# Altium PCB PnP.PcbDoc (part 1 of 5)
Units mm, origin at the board's own origin, x right, y up, seen from the top; angles counter-clockwise.
Board outline 95 x 65 mm, 6 copper layers (Top Layer, L2 - GND, L3 - PWR, L4 - Sig, L5 - GND, Bottom Layer), stack 1.538 mm thick; 358 components, 260 nets, 1269 pads, 686 vias.
Unrouted connection lines stored in the file: 161.
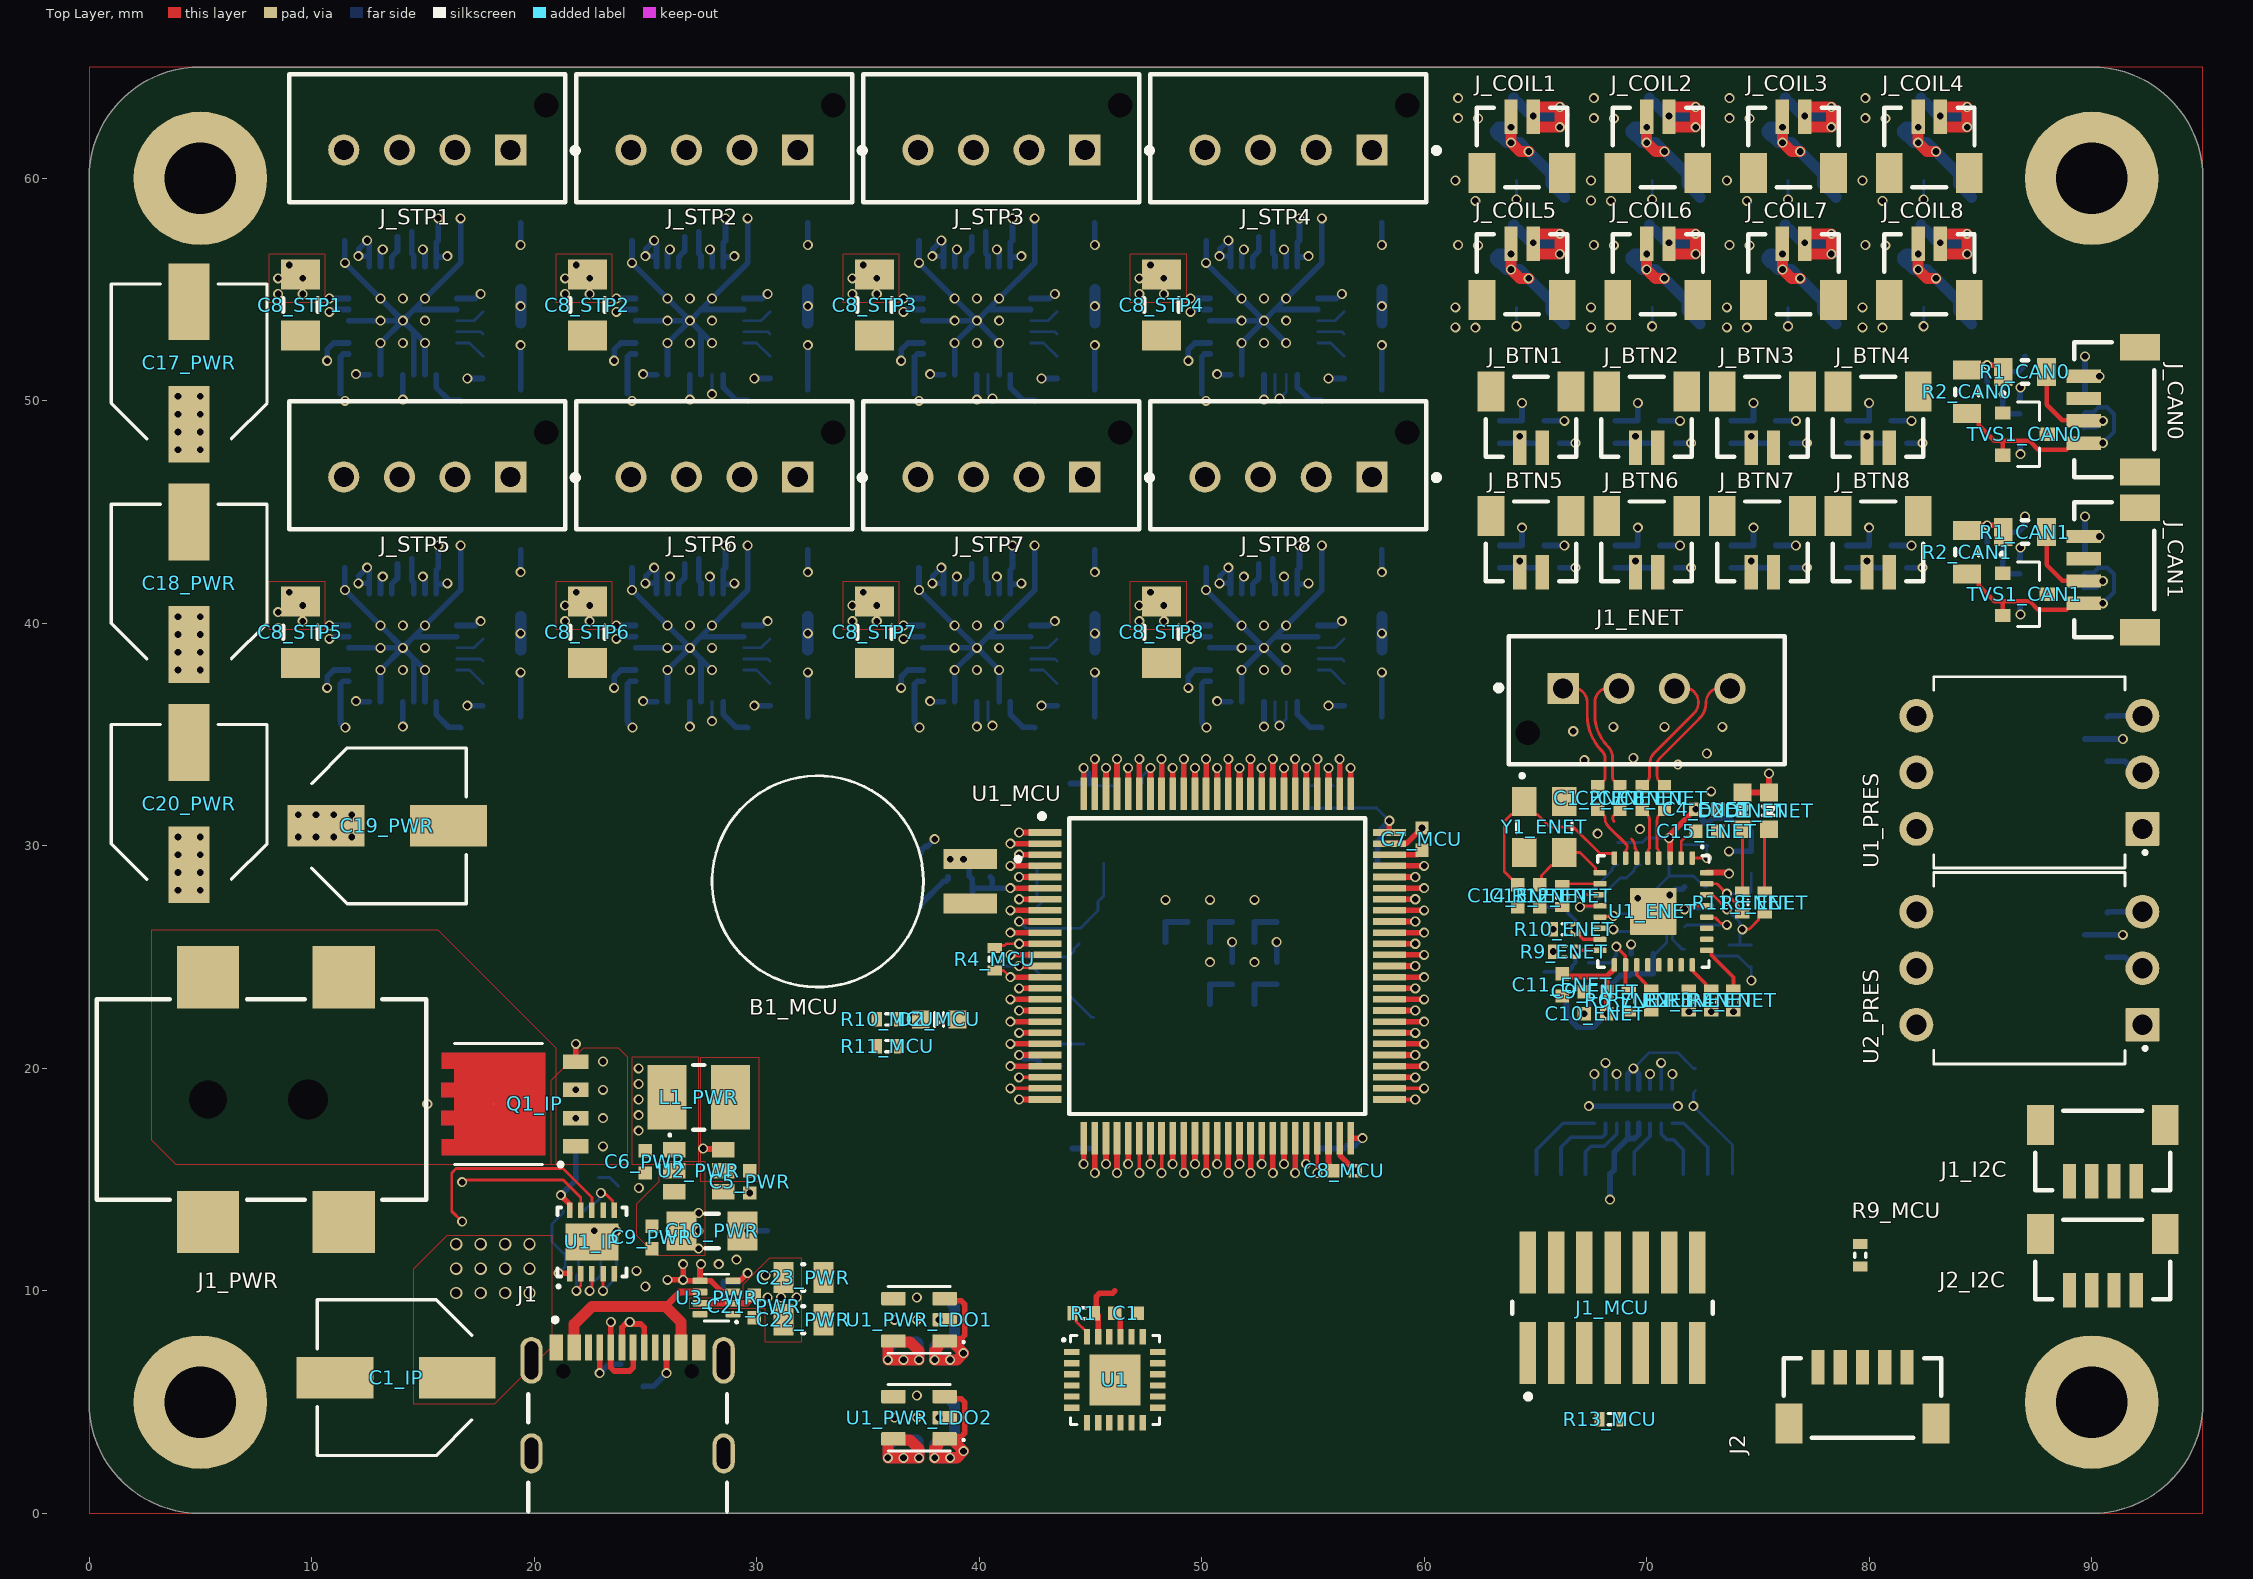
[diagram p0: Top Layer view]
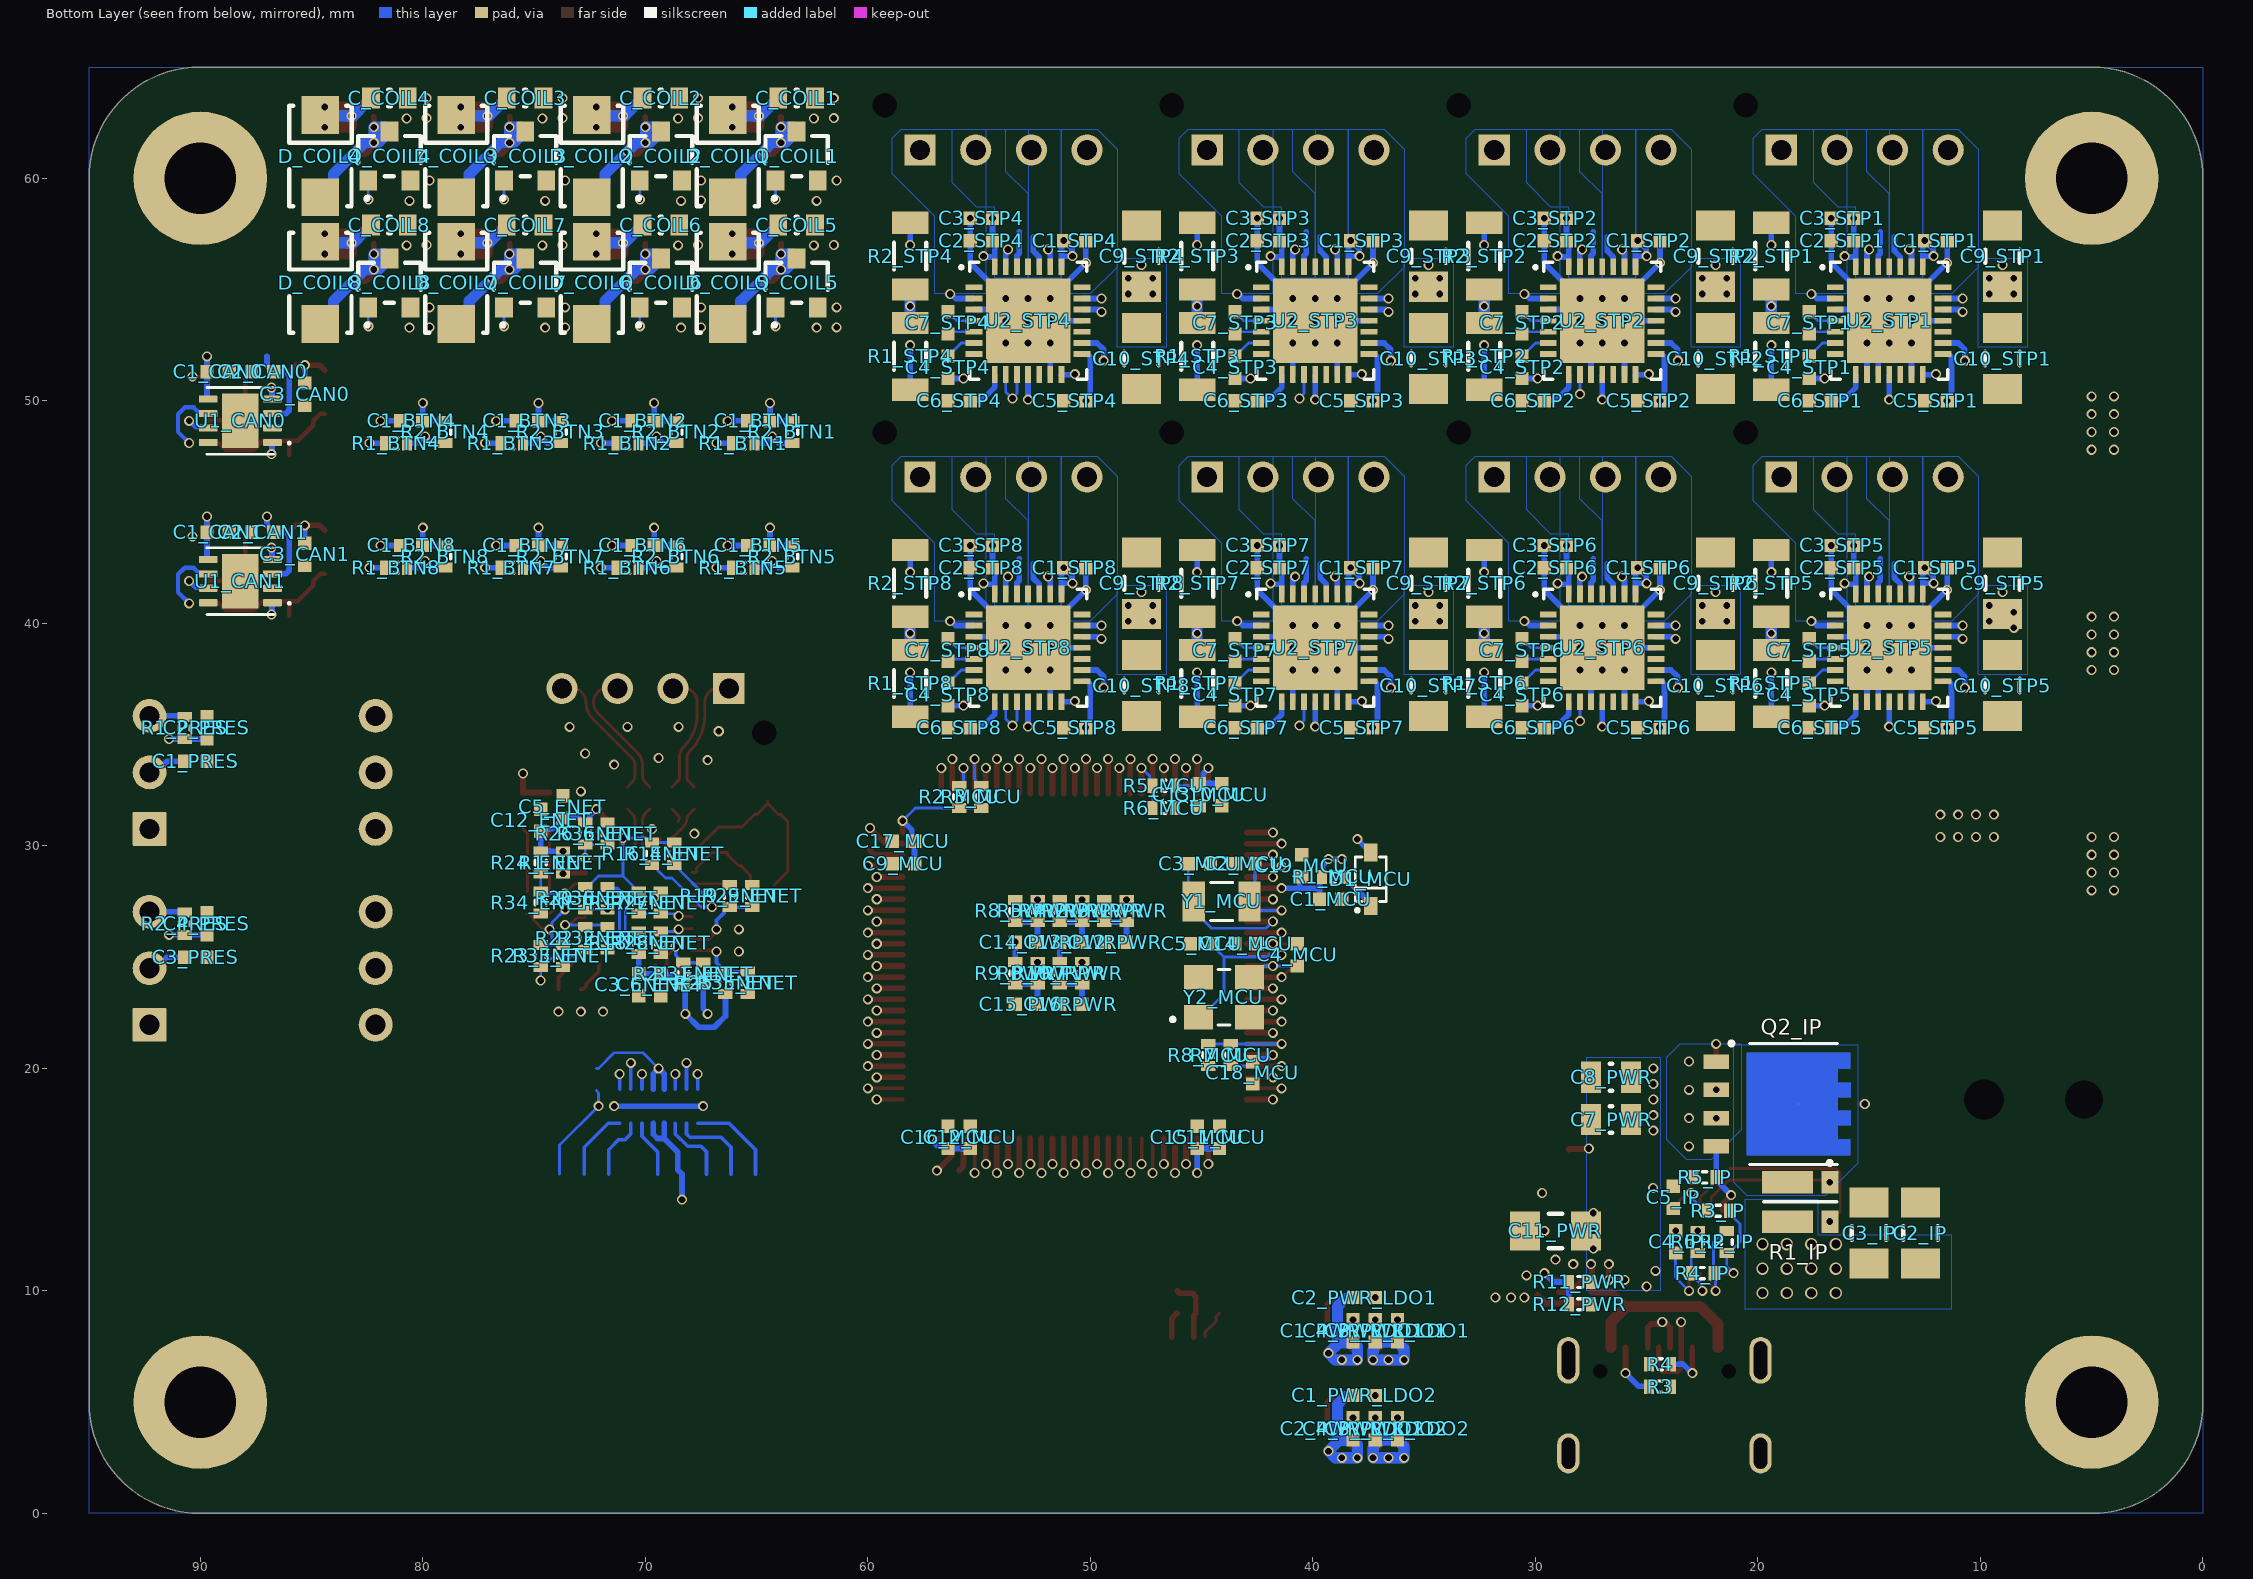
[diagram p1: Bottom Layer view, seen from below]
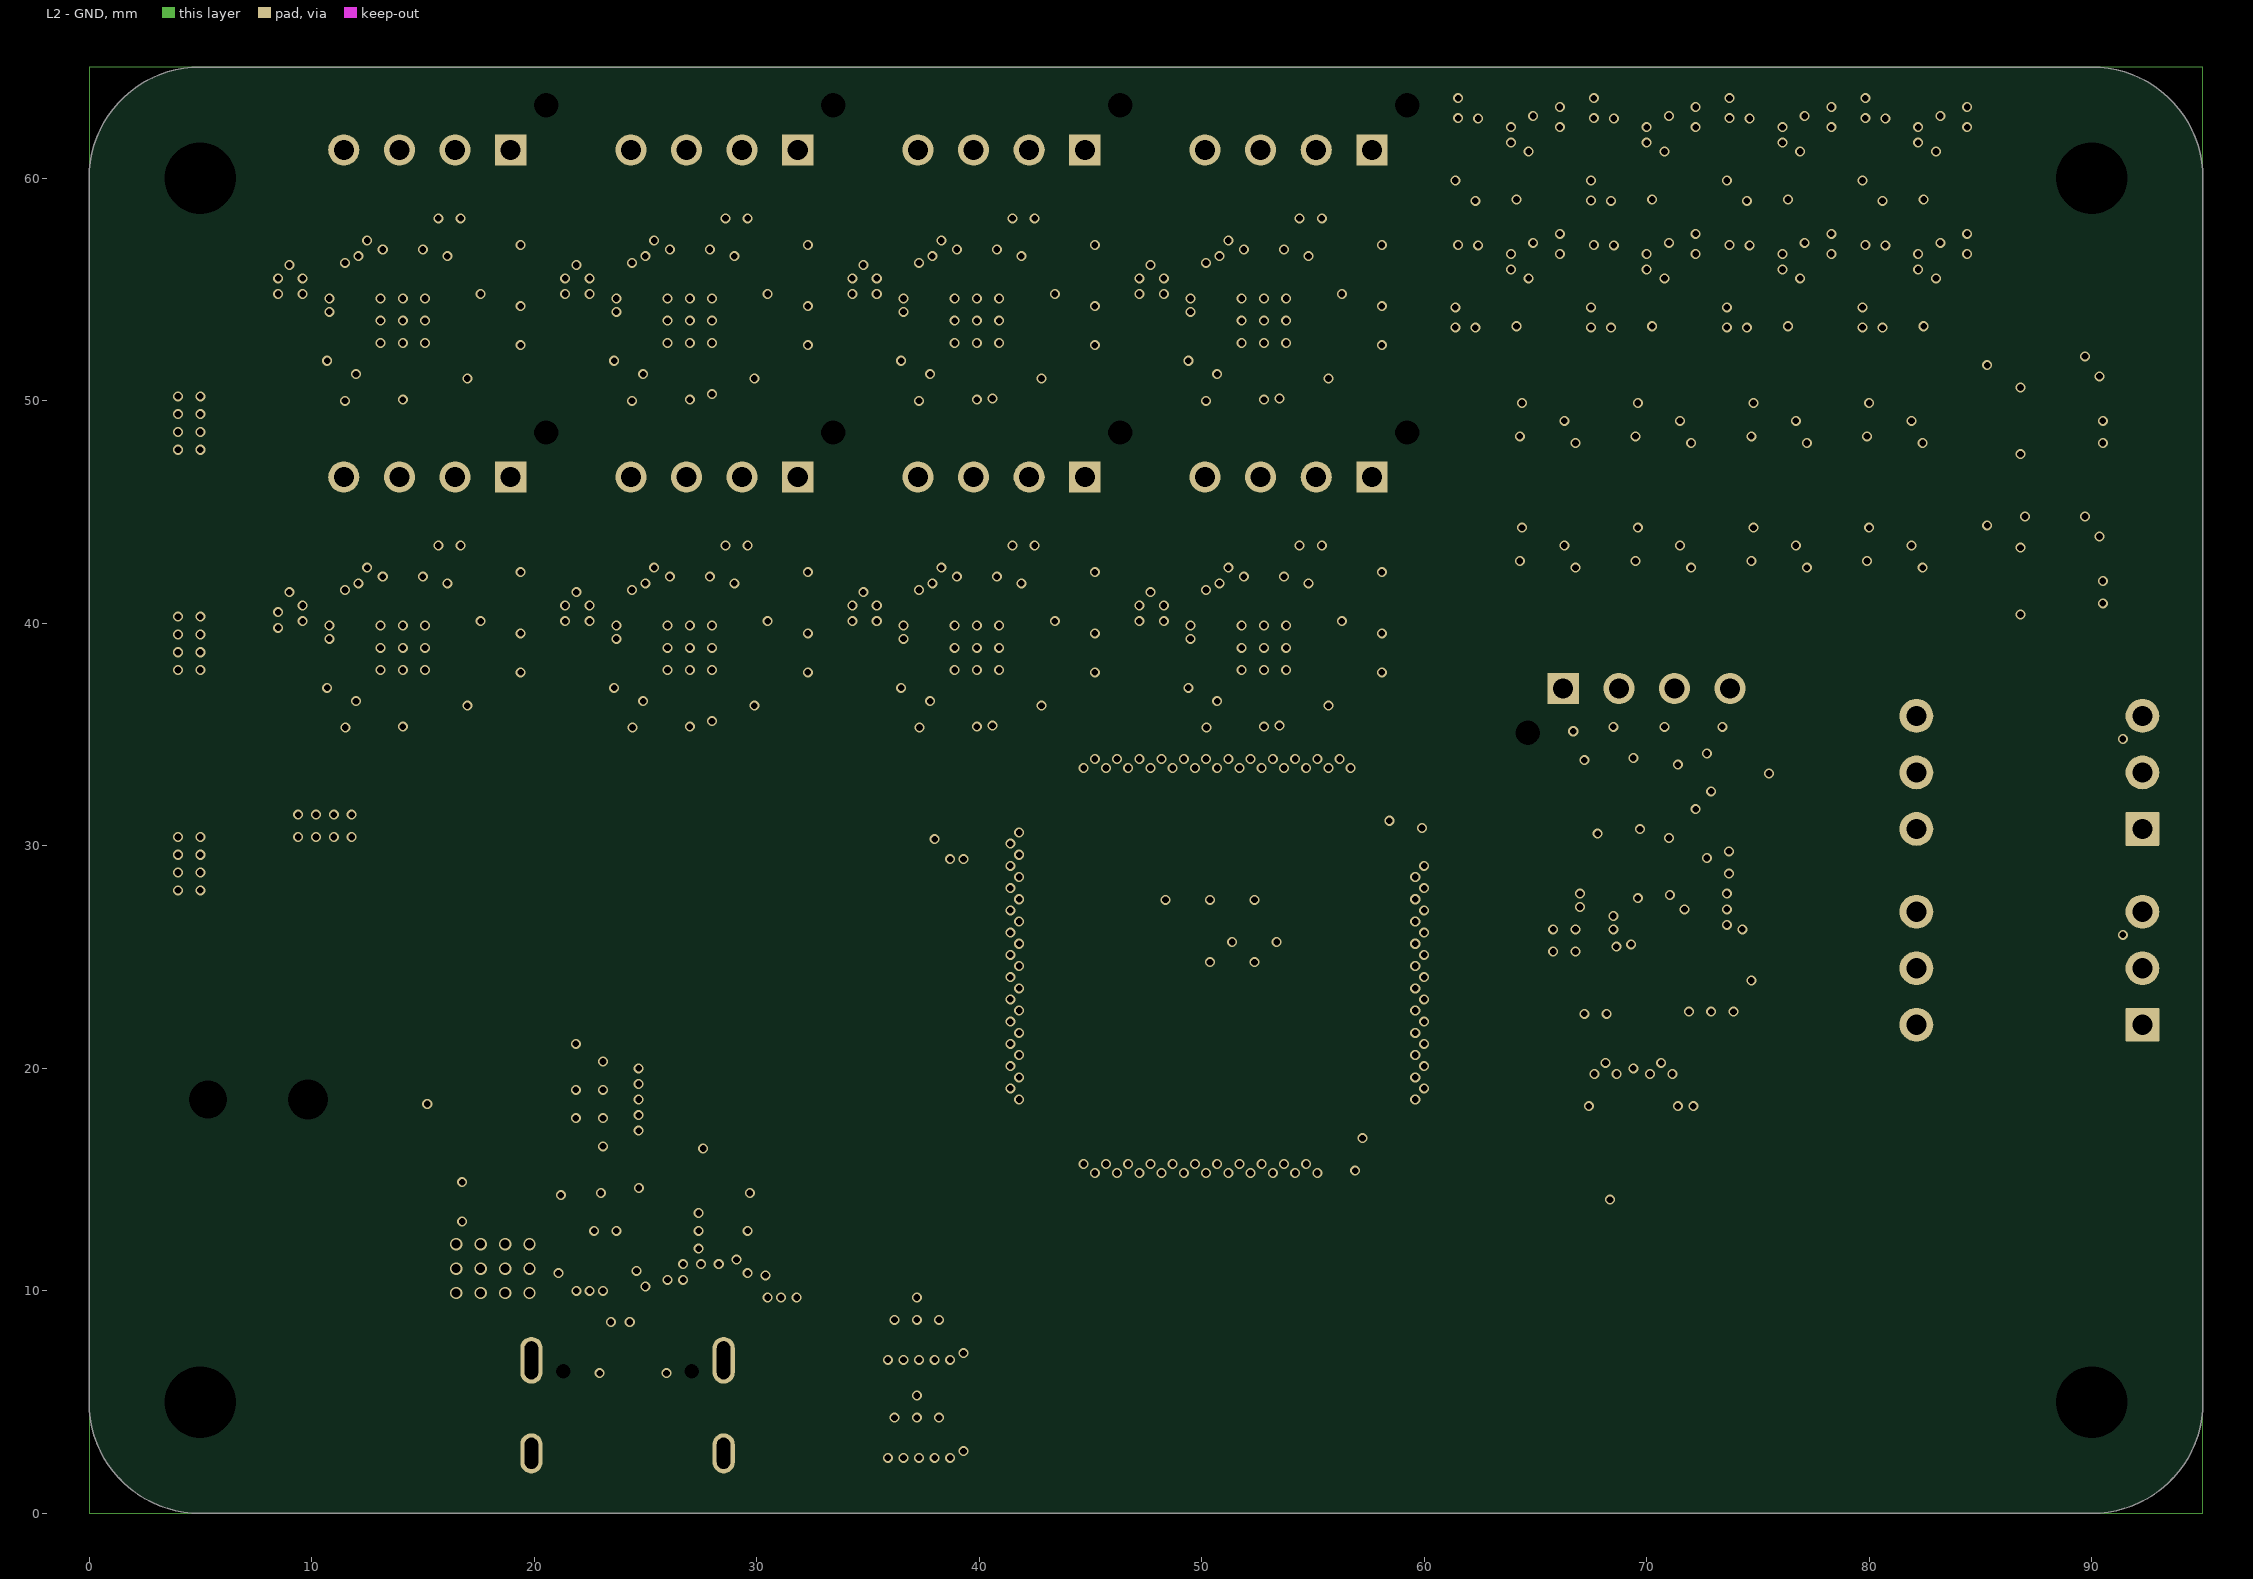
[diagram p2: L2 - GND]
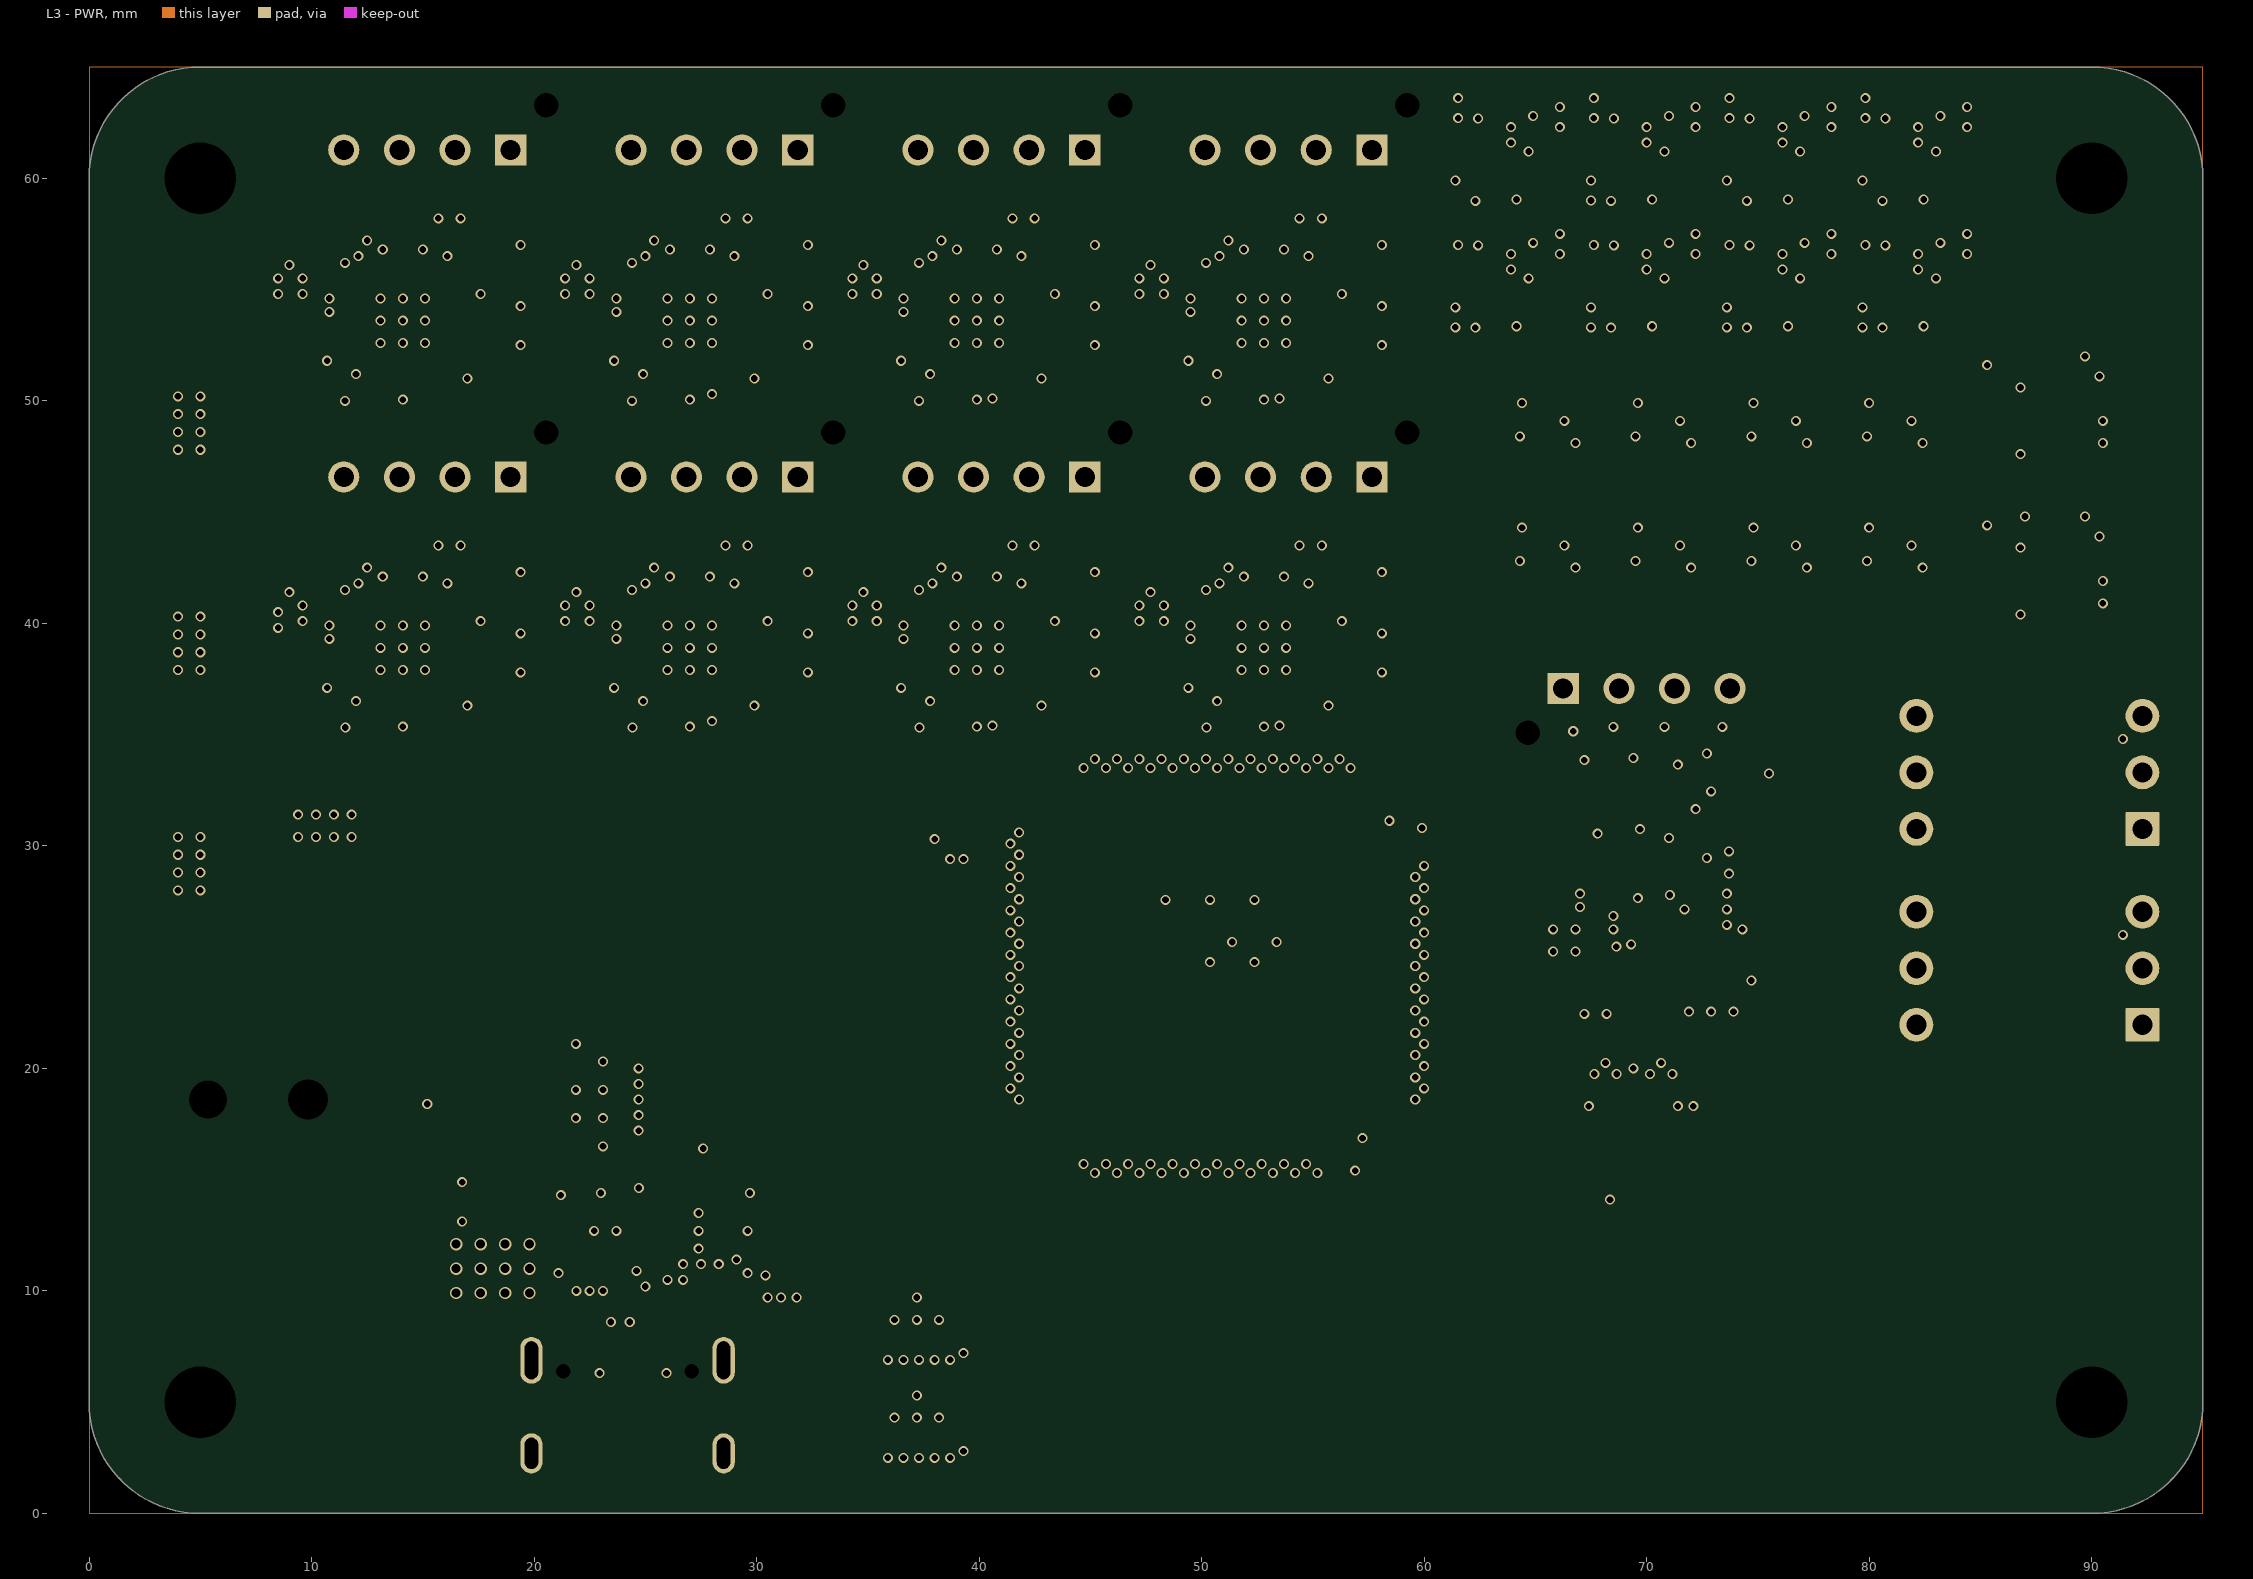
[diagram p3: L3 - PWR]
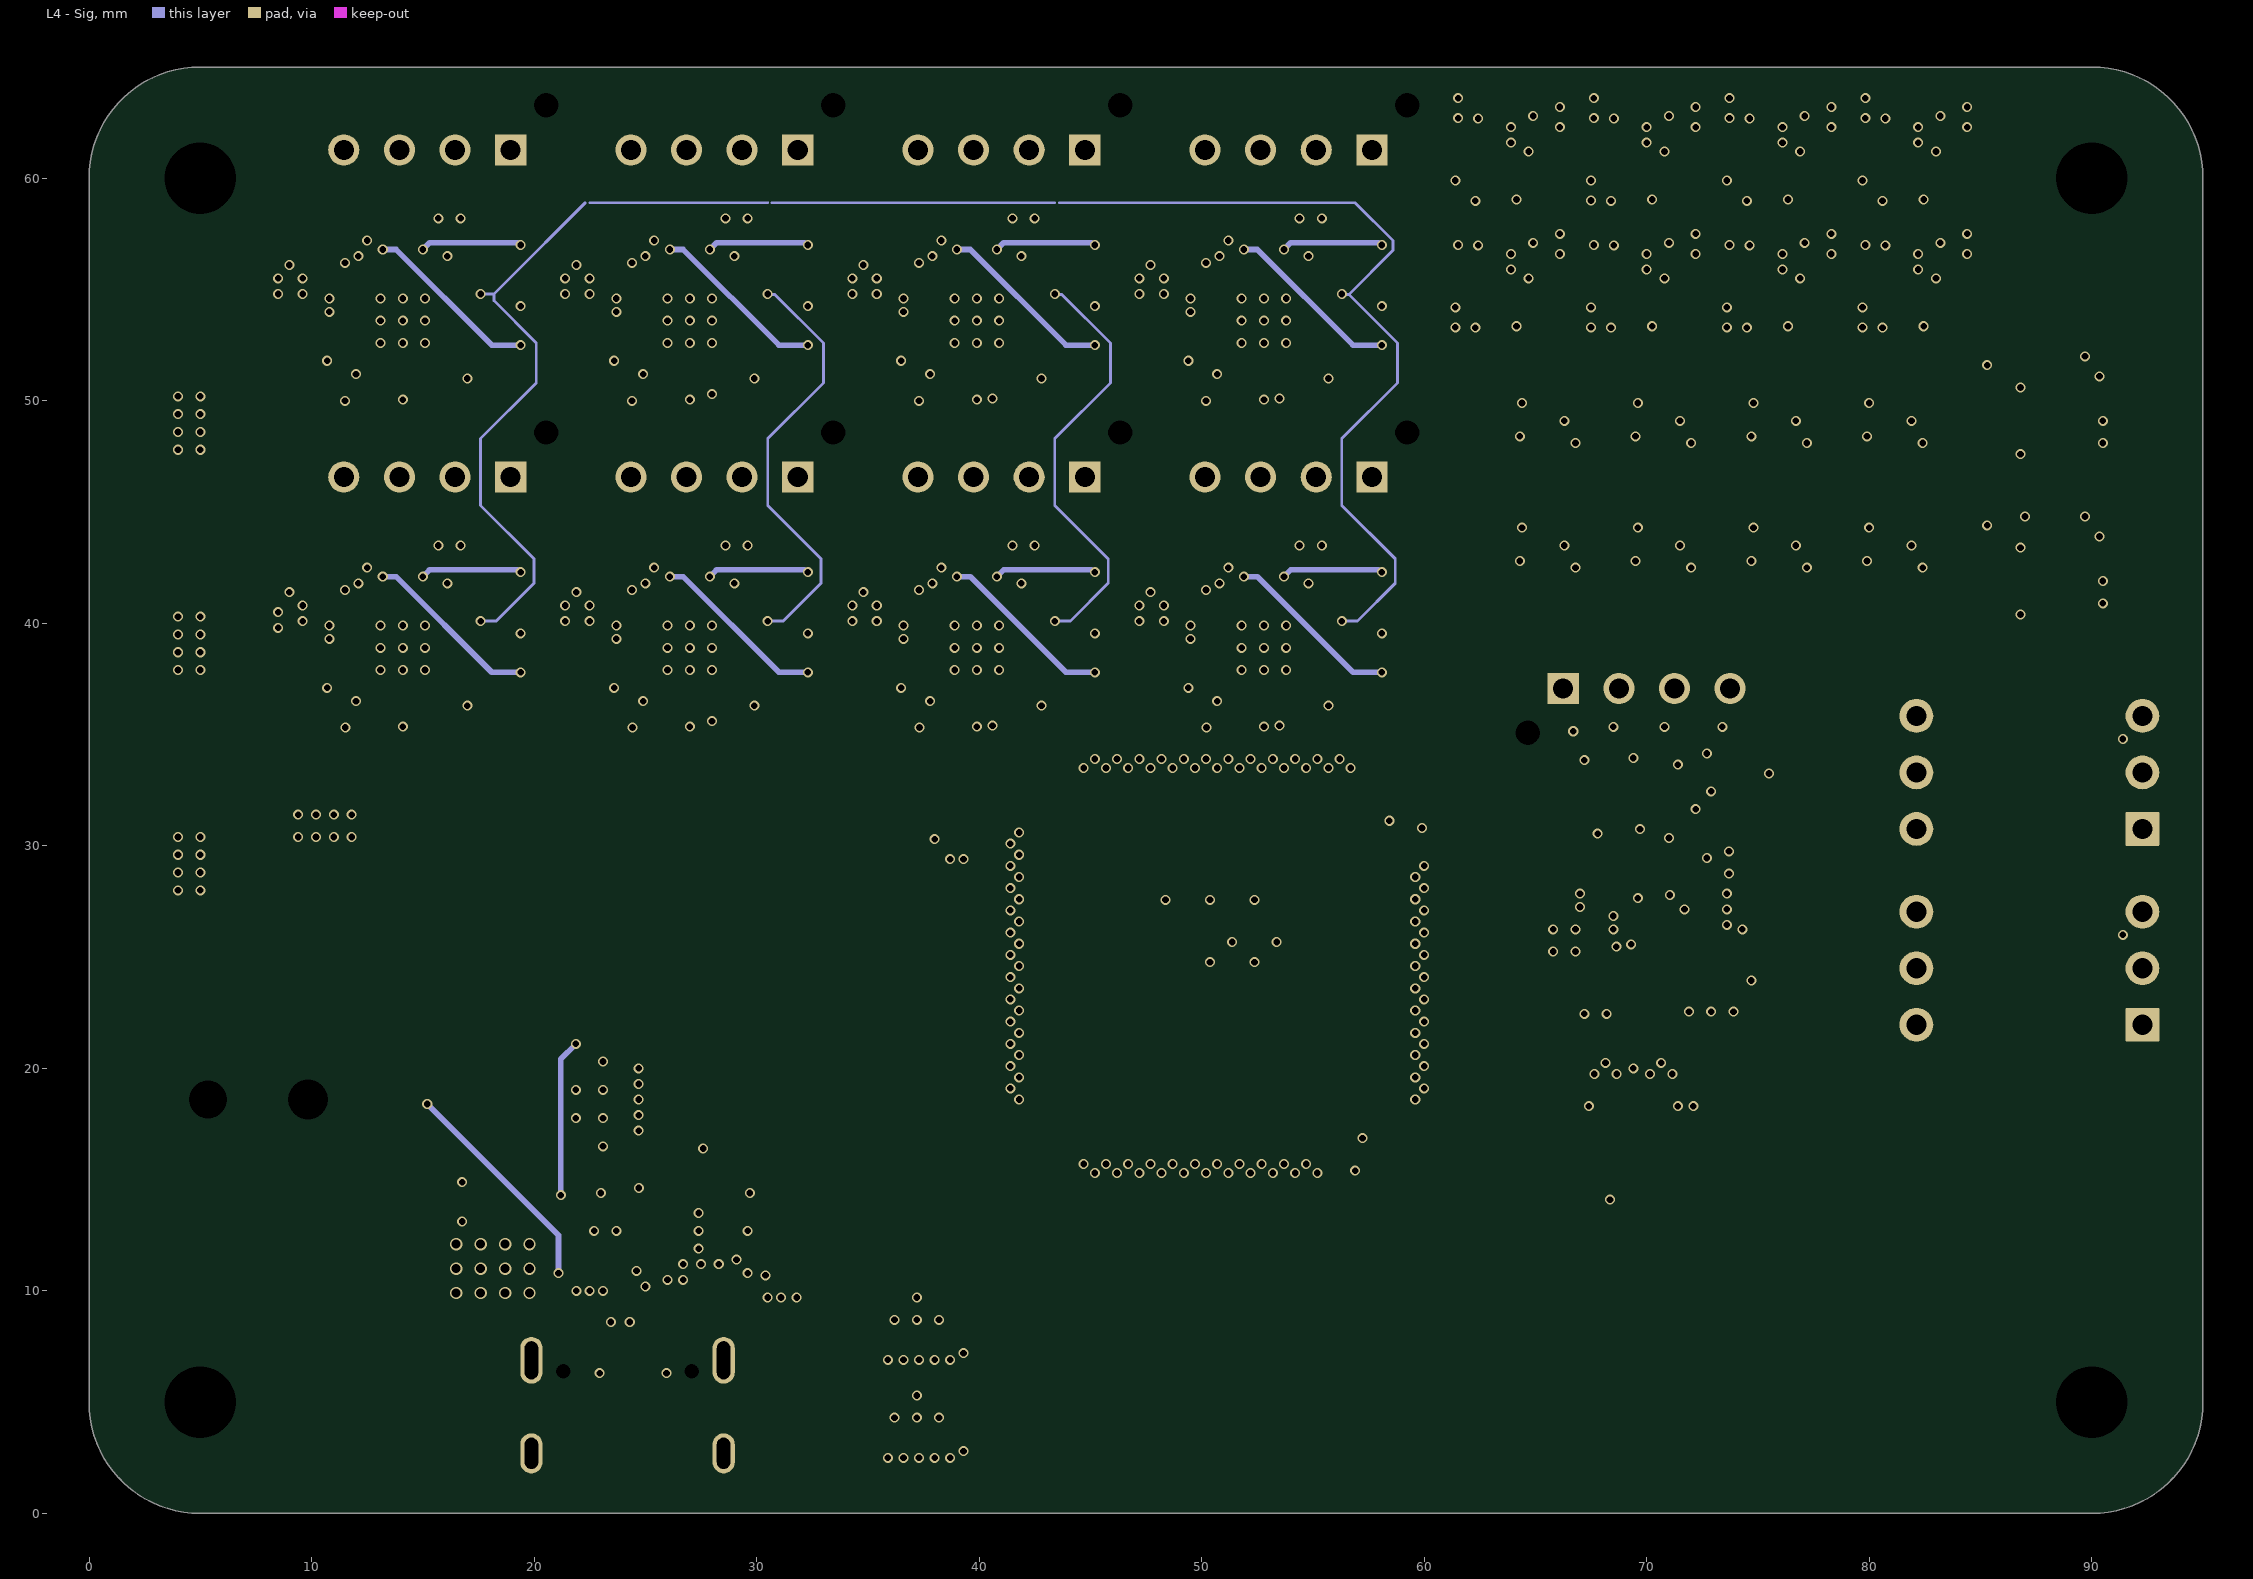
[diagram p4: L4 - Sig]
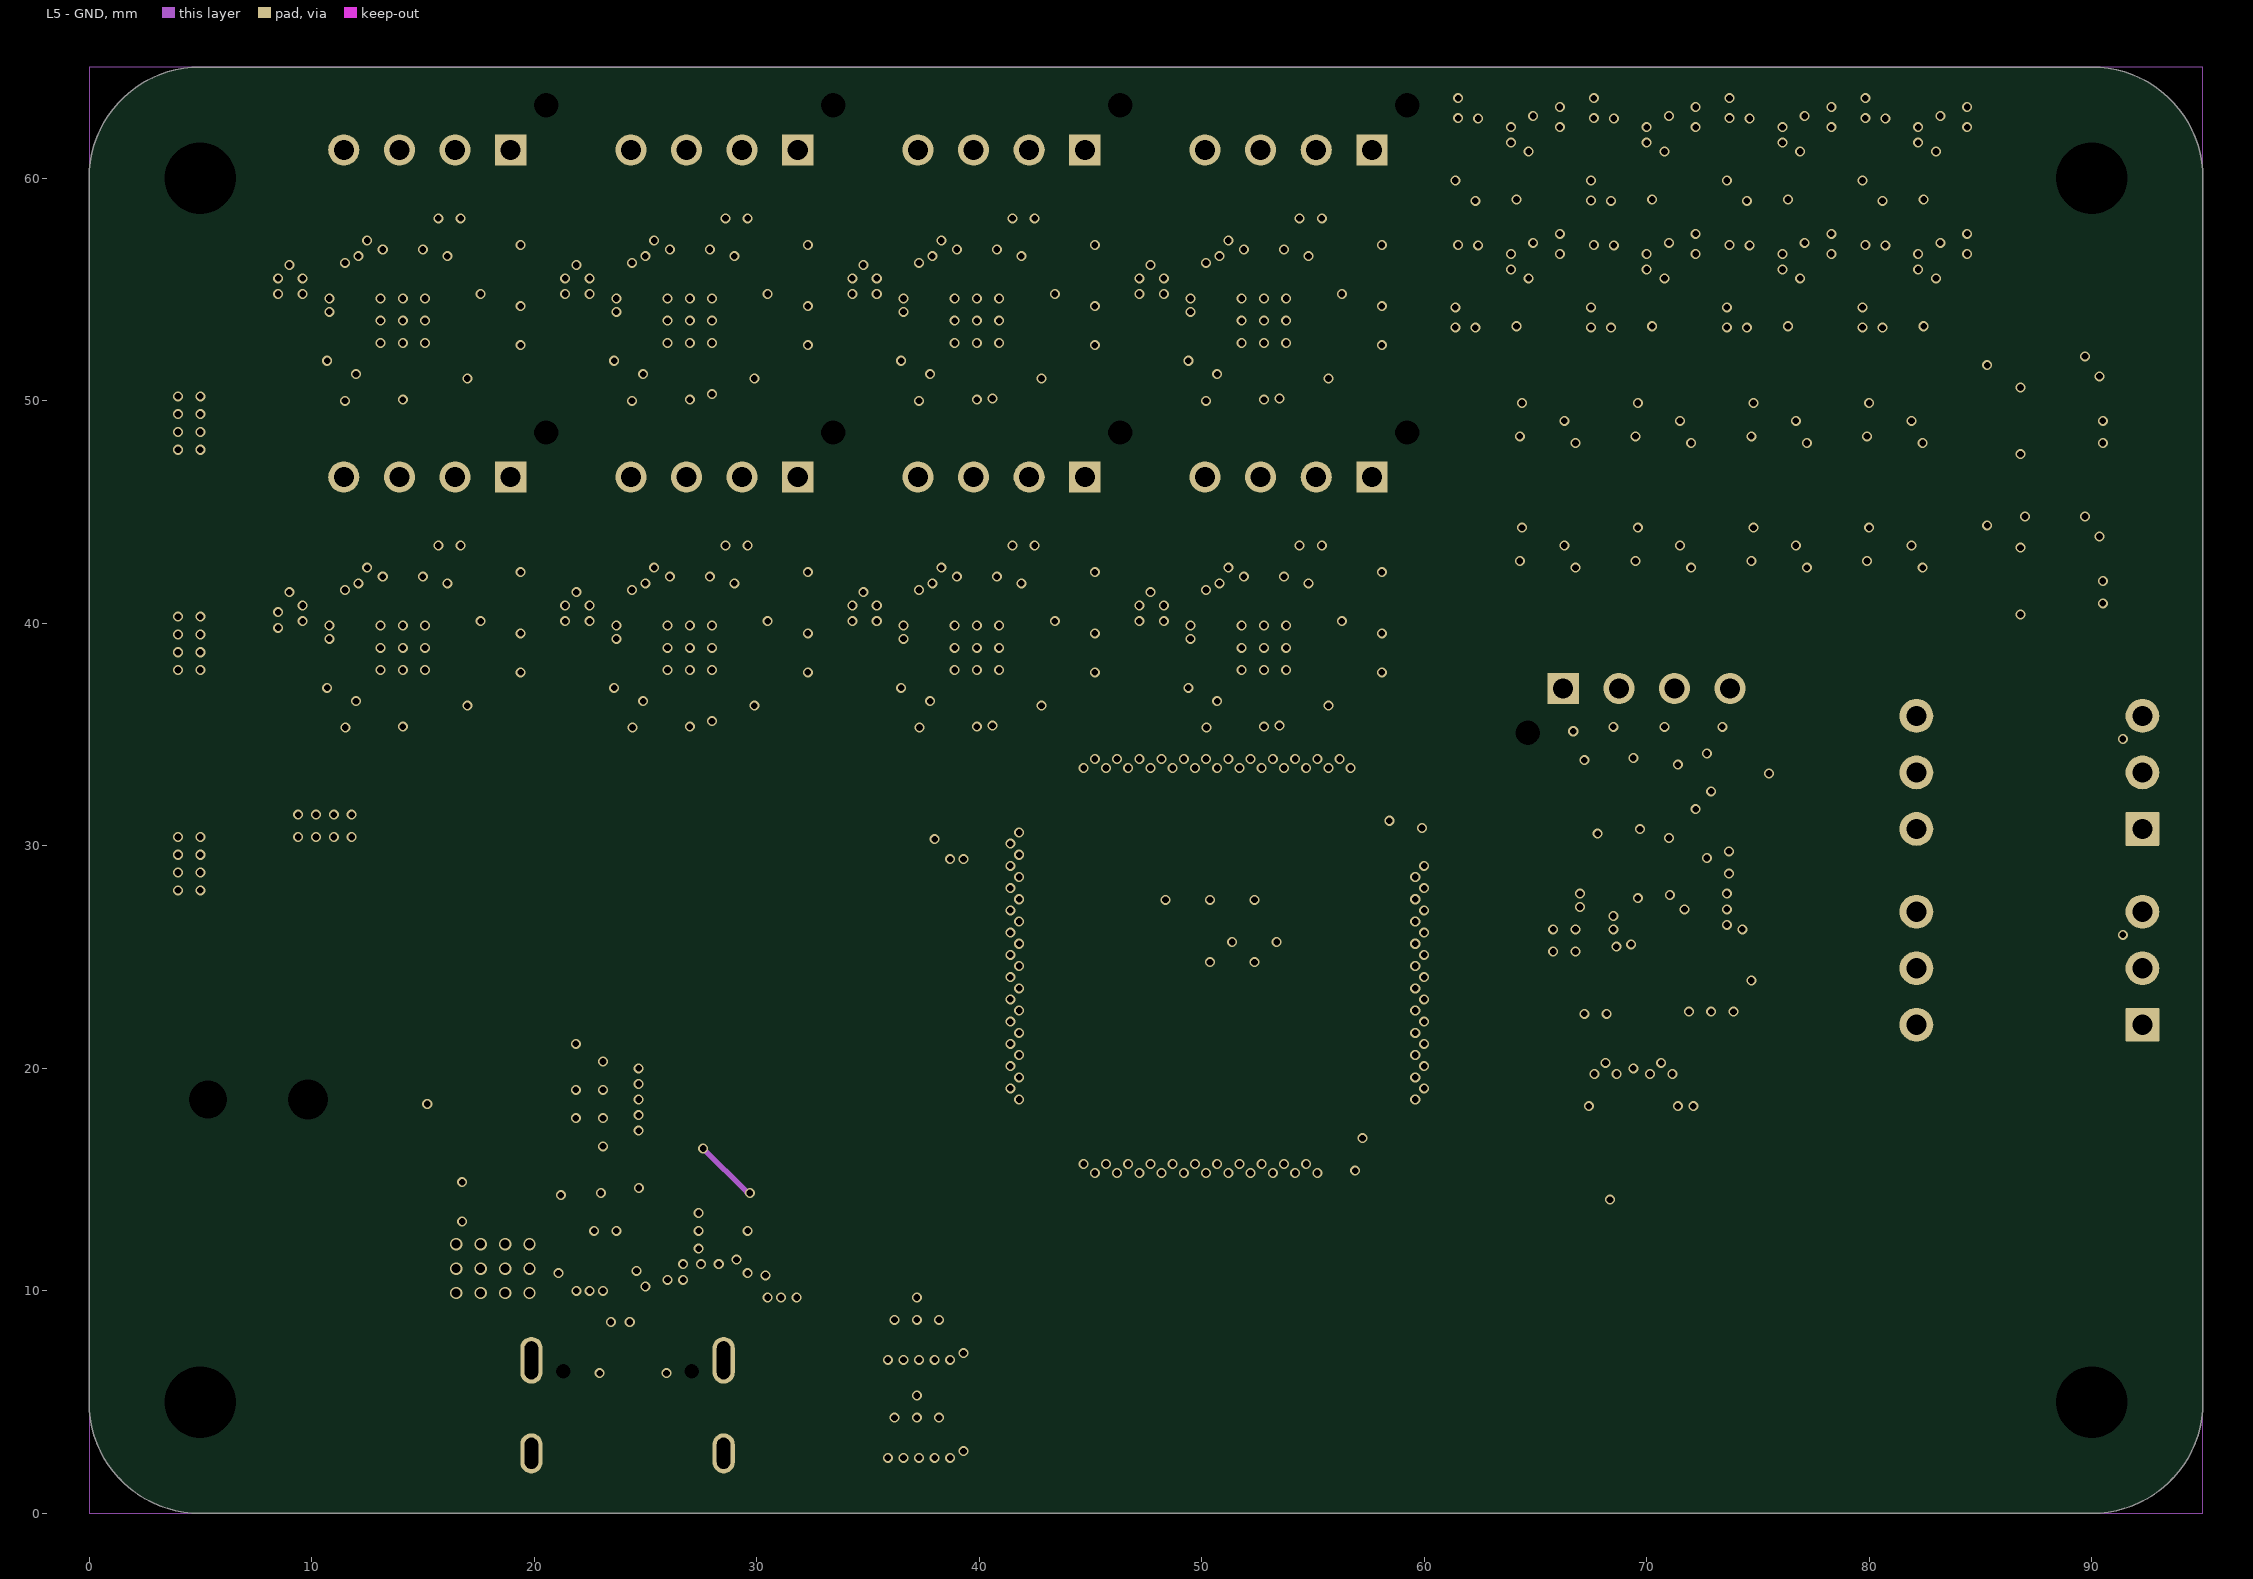
[diagram p5: L5 - GND]
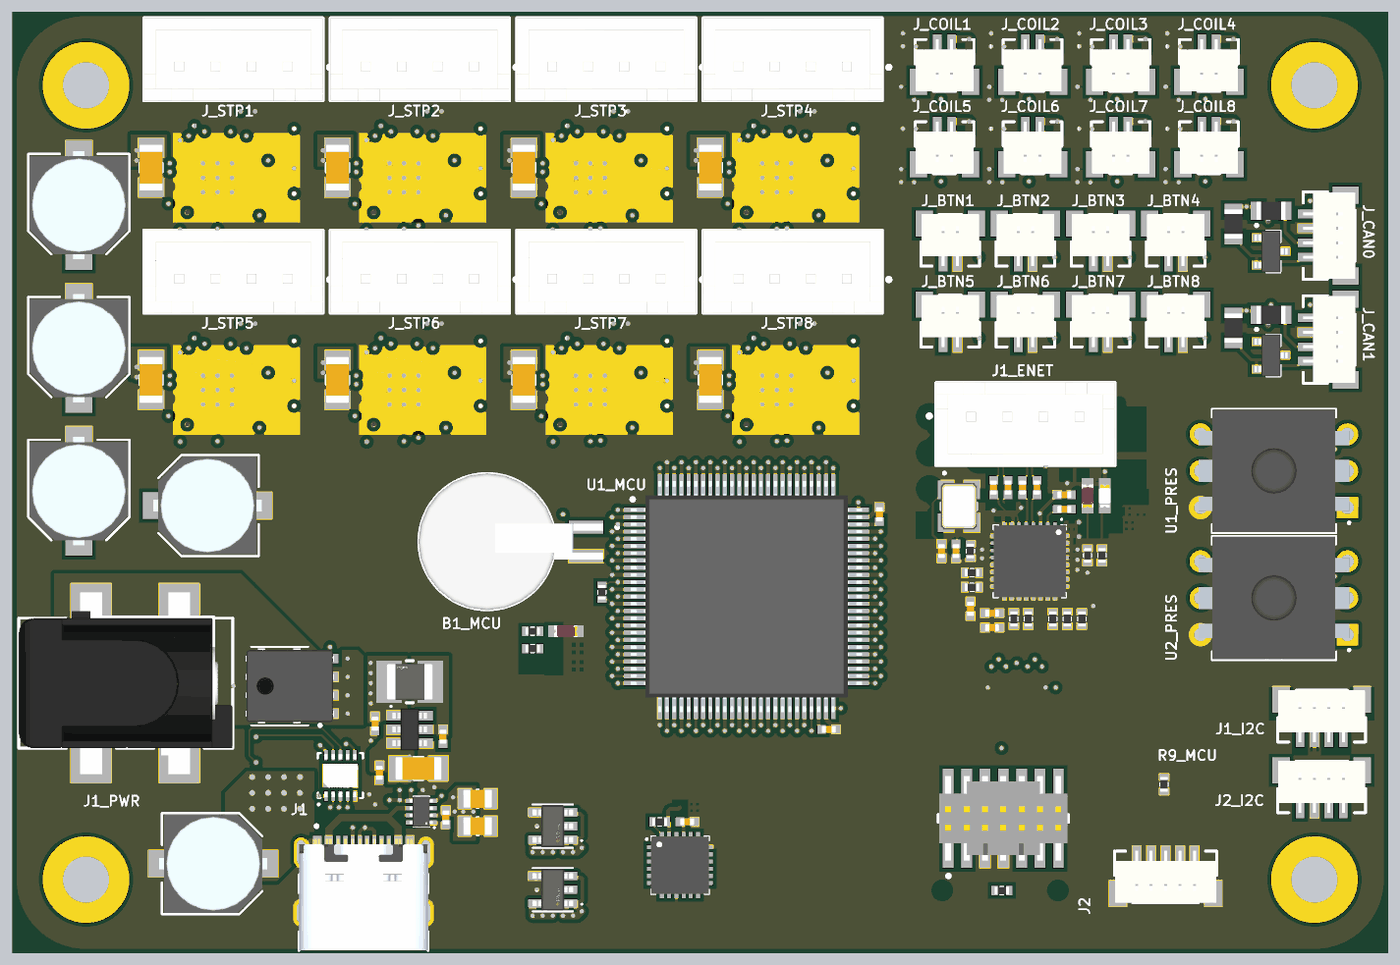
[diagram p9: 3D render of the assembled board from above, using the file's embedded part models]
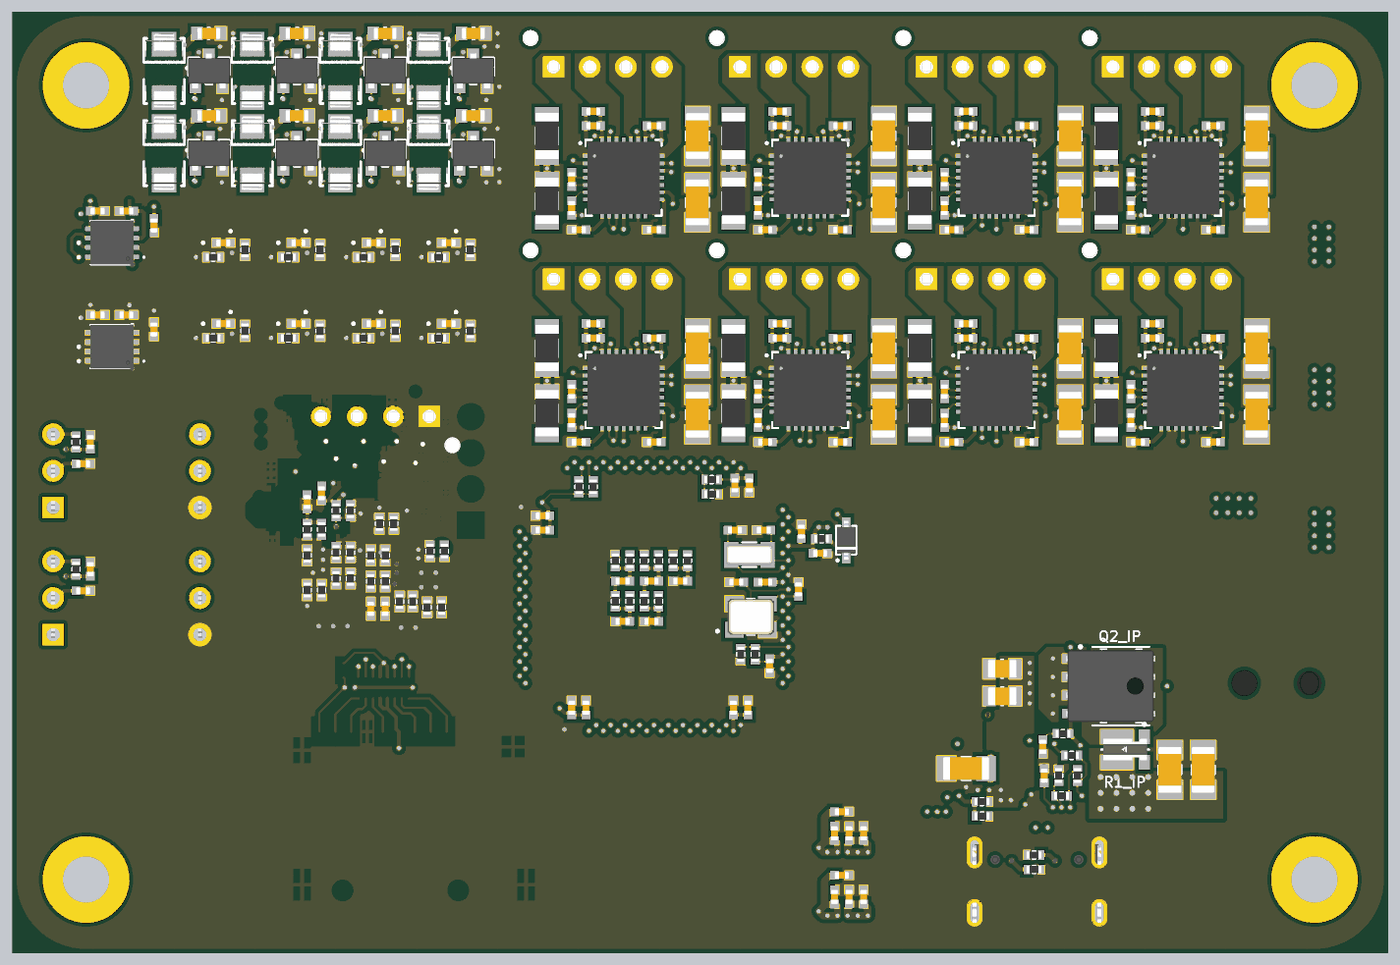
[diagram p10: 3D render of the assembled board from below, using the file's embedded part models]

## Layer stack, top to bottom
Top Solder: solder mask 0.015, SM-001, Dk 4
Top Layer: signal copper 0.035
Dielectric 2: prepreg 0.0994, PP-006, Dk 4.1
L2 - GND: signal copper 0.0152
Dielectric 4: core 0.55, PP-006, Dk 4.41
L3 - PWR: signal copper 0.0152
Dielectric 1: prepreg 0.1088, FR4_TG135_TG150_Dk4.3_Df0.02, Dk 4.16
L4 - Sig: signal copper 0.0152
Dielectric 5: core 0.55, PP-006, Dk 4.41
L5 - GND: signal copper 0.0152
Dielectric 3: prepreg 0.0994, PP-006, Dk 4.1
Bottom Layer: signal copper 0.035
Bottom Solder: solder mask 0.015, SM-001, Dk 4

## Board outline
5,0 cw(c5,5) 0,5 0,60 cw(c5,60) 5,65 90,65 cw(c90,60) 95,60 95,5 cw(c90,5) 90,0

## Design rules (kind name [scope] priority, off if disabled: settings)
AssemblyTestPointUsage [All] p1: isadvanced=TRUE
AssemblyTestpoint [All] p1: isadvanced=TRUE testpointundercomponent=TRUE minsize=1.016 maxsize=2.54 preferedsize=1.524 minholesize=0 maxholesize=1.016 preferedholesize=0.813 testpointgrid=0.025 usegrid=TRUE gridoriginx=166.25 gridoriginy=192.7 gridtolerance=0 allowsidetop=TRUE allowsidebottom=TRUE
BoardOutlineClearance BoardOutlineClearance_1 [All] p1: isadvanced=TRUE gap=0.2 ignorepadtopadclearanceinfootprint=FALSE
Clearance Clearance_polygon [InPolygon] p1: gap=0.254 ignorepadtopadclearanceinfootprint=FALSE
Clearance [All] p2: gap=0.127 ignorepadtopadclearanceinfootprint=FALSE
ComponentClearance [All] p1: isadvanced=TRUE gap=0.254 collisioncheckmode=3 verticalgap=0.254 showdistances=FALSE
DiffPairsRouting [InDifferentialPairClass('D100_ENET')] p1: maxlimit=0.254 minlimit=0.127 mostfreqgap=0.254 toplayer_mingap=0.215 toplayer_maxgap=0.215 toplayer_prefgap=0.215 toplayer_minwidth=0.127 toplayer_maxwidth=0.127 toplayer_prefwidth=0.127 midlayer3_maxgap=0.127 midlayer3_prefgap=0.127 midlayer3_minwidth=0.107 midlayer3_maxwidth=0.107 midlayer3_prefwidth=0.107 midlayer4_maxgap=0.127 midlayer4_prefgap=0.127 midlayer4_minwidth=0.107 midlayer4_maxwidth=0.107 midlayer4_prefwidth=0.107 bottomlayer_mingap=0.215 bottomlayer_maxgap=0.215 bottomlayer_prefgap=0.215 bottomlayer_minwidth=0.127 bottomlayer_maxwidth=0.127 bottomlayer_prefwidth=0.127 impedanceprofiledriven=TRUE impedanceprofileid={404B1338-802D-463F-9344-648F71163B0D} impedanceprofilevalue=100.000000 maxuncoupledlength=12.7
DiffPairsRouting DiffPairs_CAN [InDifferentialPairClass('CAN')] p2: maxlimit=0.2 minlimit=0.2 mostfreqgap=0.2 toplayer_minwidth=0.2 toplayer_maxwidth=0.2 toplayer_prefwidth=0.2 midlayer1_minwidth=0.2 midlayer1_maxwidth=0.2 midlayer1_prefwidth=0.2 midlayer2_minwidth=0.2 midlayer2_maxwidth=0.2 midlayer2_prefwidth=0.2 midlayer3_minwidth=0.2 midlayer3_maxwidth=0.2 midlayer3_prefwidth=0.2 midlayer4_minwidth=0.2 midlayer4_maxwidth=0.2 midlayer4_prefwidth=0.2 bottomlayer_minwidth=0.2 bottomlayer_maxwidth=0.2 bottomlayer_prefwidth=0.2 maxuncoupledlength=12.7
FabricationTestPointUsage [All] p1: isadvanced=TRUE valid=0 allowmultiple=FALSE
FabricationTestpoint [All] p1: isadvanced=TRUE side=3 testpointundercomponent=TRUE minsize=1.016 maxsize=2.54 preferedsize=1.524 minholesize=0 maxholesize=1.016 preferedholesize=0.813 testpointgrid=0.025 allowsidetop=TRUE allowsidebottom=TRUE usegrid=TRUE gridoriginx=166.25 gridoriginy=192.7 gridtolerance=0
FanoutControl Fanout_BGA [IsBGA] p1: isadvanced=TRUE bgadir=Out bgaviamode=Centered fanoutstyle=Auto fanoutdirection=Alternating viagrid=0.025 // Fanout_BGA (Default Rule)
FanoutControl Fanout_LCC [IsLCC] p2: isadvanced=TRUE bgadir=Out bgaviamode=Centered fanoutstyle=Auto fanoutdirection=Alternating viagrid=0.025 // Fanout_LCC (Default Rule)
FanoutControl Fanout_SOIC [IsSOIC] p3: isadvanced=TRUE bgadir=Out bgaviamode=Centered fanoutstyle=Auto fanoutdirection=Alternating viagrid=0.025 // Fanout_SOIC (Default Rule)
FanoutControl Fanout_Small [(CompPinCount < 5)] p4: isadvanced=TRUE bgadir=Out bgaviamode=Centered fanoutstyle=Auto fanoutdirection=OutThenIn viagrid=0.025 // Fanout_Small (Default Rule)
FanoutControl Fanout_Default [All] p5: isadvanced=TRUE bgadir=Out bgaviamode=Centered fanoutstyle=Auto fanoutdirection=Alternating viagrid=0.025 // Fanout_Default (Default Rule)
Height [All] p1: isadvanced=TRUE minheight=0 maxheight=25.4 prefheight=12.7
HoleSize [All] p1: isadvanced=TRUE absolutevalues=TRUE maxlimit=5 minlimit=0.25 maxpercent=80.000 minpercent=20.000
HoleToHoleClearance [All] p1: isadvanced=TRUE gap=0.254 allowstackedmicrovias=TRUE
LayerPairs [All] p1: isadvanced=TRUE enforce=TRUE
MinimumSolderMaskSliver [All] p1: isadvanced=TRUE minsoldermaskwidth=0.1
NetAntennae [All] p1: isadvanced=TRUE netantennaetolerance=0
PasteMaskExpansion [All] p1: isadvanced=TRUE expansion=0
PlaneClearance [All] p1: isadvanced=TRUE clearance=0.254
PlaneConnect [All] p1: isadvanced=TRUE pad.planeconnectstyle=Relief pad.reliefexpansion=0.508 pad.reliefentries=4 pad.reliefconductorwidth=0.254 pad.reliefairgap=0.254 via.planeconnectstyle=Direct via.reliefexpansion=0.508 via.reliefentries=4 via.reliefconductorwidth=0.254 via.reliefairgap=0.254
PolygonConnect PolygonConnectStyle_Direct [IsNamedPolygon('PolygonDirect')] p1: isadvanced=TRUE connectstyle=Direct reliefconductorwidth=0.254 reliefentries=2 polygonreliefangle="0 Angle" airgapwidth=0.254
RoomDefinition COIL4 [InComponentClass('COIL4')] p1: confinementstyle=ConfineIn formatcopy=TRUE lockcomponents=FALSE outline 88.236,55.494 88.236,61.561 95.04,61.561 95.04,61.059 95.337,61.059 95.337,54.971 91.739,54.971 91.739,55.494
RoomDefinition COIL8 [InComponentClass('COIL8')] p2: confinementstyle=ConfineIn formatcopy=TRUE lockcomponents=FALSE outline 88.286,48.844 88.286,54.911 95.09,54.911 95.09,54.409 95.387,54.409 95.387,48.321 91.789,48.321 91.789,48.844
RoomDefinition COIL7 [InComponentClass('COIL7')] p3: confinementstyle=ConfineIn formatcopy=TRUE lockcomponents=FALSE outline 78.986,48.844 78.986,54.911 85.79,54.911 85.79,54.409 86.087,54.409 86.087,48.321 82.489,48.321 82.489,48.844
RoomDefinition COIL6 [InComponentClass('COIL6')] p4: confinementstyle=ConfineIn formatcopy=TRUE lockcomponents=FALSE outline 69.686,48.844 69.686,54.911 76.49,54.911 76.49,54.409 76.787,54.409 76.787,48.321 73.189,48.321 73.189,48.844
RoomDefinition COIL3 [InComponentClass('COIL3')] p5: confinementstyle=ConfineIn formatcopy=TRUE lockcomponents=FALSE outline 78.986,55.444 78.986,61.511 85.79,61.511 85.79,61.009 86.087,61.009 86.087,54.921 82.489,54.921 82.489,55.444
RoomDefinition COIL2 [InComponentClass('COIL2')] p6: confinementstyle=ConfineIn formatcopy=TRUE lockcomponents=FALSE outline 69.686,55.444 69.686,61.511 76.49,61.511 76.49,61.009 76.787,61.009 76.787,54.921 73.189,54.921 73.189,55.444
RoomDefinition COIL1 [InComponentClass('COIL1')] p7: confinementstyle=ConfineIn formatcopy=TRUE lockcomponents=FALSE outline 61.998,57.079 61.998,63.146 68.802,63.146 68.802,62.644 69.099,62.644 69.099,56.556 65.501,56.556 65.501,57.079
RoomDefinition BTN8 [InComponentClass('BTN8')] p8: confinementstyle=ConfineIn formatcopy=TRUE lockcomponents=FALSE outline 78.098,38.154 78.098,44.221 84.902,44.221 84.902,38.154
RoomDefinition BTN7 [InComponentClass('BTN7')] p9: confinementstyle=ConfineIn formatcopy=TRUE lockcomponents=FALSE outline 72.898,38.154 72.898,44.221 79.702,44.221 79.702,38.154
RoomDefinition BTN6 [InComponentClass('BTN6')] p10: confinementstyle=ConfineIn formatcopy=TRUE lockcomponents=FALSE outline 67.698,38.154 67.698,44.221 74.502,44.221 74.502,38.154
RoomDefinition BTN5 [InComponentClass('BTN5')] p11: confinementstyle=ConfineIn formatcopy=TRUE lockcomponents=FALSE outline 62.498,38.154 62.498,44.221 69.302,44.221 69.302,38.154
RoomDefinition BTN4 [InComponentClass('BTN4')] p12: confinementstyle=ConfineIn formatcopy=TRUE lockcomponents=FALSE outline 78.098,43.754 78.098,49.821 84.902,49.821 84.902,43.754
RoomDefinition BTN3 [InComponentClass('BTN3')] p13: confinementstyle=ConfineIn formatcopy=TRUE lockcomponents=FALSE outline 72.898,43.754 72.898,49.821 79.702,49.821 79.702,43.754
RoomDefinition BTN2 [InComponentClass('BTN2')] p14: confinementstyle=ConfineIn formatcopy=TRUE lockcomponents=FALSE outline 67.698,43.754 67.698,49.821 74.502,49.821 74.502,43.754
RoomDefinition BTN1 [InComponentClass('BTN1')] p15: confinementstyle=ConfineIn formatcopy=TRUE lockcomponents=FALSE outline 62.498,43.754 62.498,49.821 69.302,49.821 69.302,43.754
RoomDefinition COIL5 [InComponentClass('COIL5')] p16: confinementstyle=ConfineIn formatcopy=TRUE lockcomponents=FALSE outline 60.386,48.844 60.386,54.911 67.19,54.911 67.19,54.409 67.487,54.409 67.487,48.321 63.889,48.321 63.889,48.844
RoomDefinition U_5V_Buck [InComponentClass('U_5V_Buck')] p17: confinementstyle=ConfineIn formatcopy=TRUE lockcomponents=FALSE outline 79.331,-0.579 79.331,1.979 80.231,1.979 80.231,5.379 80.319,5.379 80.319,9.231 86.481,9.231 86.481,4.769 86.469,4.769 86.469,1.721 85.479,1.721 85.479,-0.429 80.869,-0.429 80.869,-0.579
RoomDefinition LDO2 [InComponentClass('LDO2')] p18: confinementstyle=ConfineIn formatcopy=TRUE lockcomponents=FALSE outline 86.321,-1.479 86.321,9.169 88.879,9.169 90.879,9.169 90.879,8.361 93.879,8.361 93.879,-1.479
RoomDefinition LDO1 [InComponentClass('LDO1')] p19: confinementstyle=ConfineIn formatcopy=TRUE lockcomponents=FALSE outline 77.531,8.721 77.531,11.279 77.531,13.279 78.339,13.279 78.339,16.279 88.179,16.279 88.179,8.721
RoomDefinition ENET [InComponentClass('ENET')] p20: confinementstyle=ConfineIn formatcopy=TRUE lockcomponents=FALSE outline 62.021,24.146 62.021,37.904 68.579,37.904 68.579,37.679 71.554,37.679 71.554,37.379 75.179,37.379 75.179,36.779 77.579,36.779 77.579,35.979 79.579,35.979 79.579,30.279 79.769,30.279 79.769,27.721 78.979,27.721 78.979,26.731 78.779,26.731 78.779,25.921 74.979,25.921 74.979,24.731 72.929,24.731 72.929,24.721 68.579,24.721 68.579,24.146
RoomDefinition CAN1 [InComponentClass('CAN1')] p21: confinementstyle=ConfineIn formatcopy=TRUE lockcomponents=FALSE outline 87.496,38.546 87.496,42.454 89.346,42.454 89.346,42.604 92.154,42.604 92.154,43.602 98.221,43.602 98.221,35.798 92.154,35.798 92.154,36.621 89.421,36.621 89.421,38.546
RoomDefinition CAN0 [InComponentClass('CAN0')] p22: confinementstyle=ConfineIn formatcopy=TRUE lockcomponents=FALSE outline 87.496,44.846 87.496,48.754 89.346,48.754 89.346,48.904 92.154,48.904 92.154,49.902 98.221,49.902 98.221,42.098 92.154,42.098 92.154,42.921 89.421,42.921 89.421,44.846
RoomDefinition STP8 [InComponentClass('STP8')] p23: confinementstyle=ConfineIn formatcopy=TRUE lockcomponents=FALSE outline 46.696,43.821 46.696,50.379 60.454,50.379 60.454,43.821 58.879,43.821 58.879,39.271 58.879,34.771 56.579,34.771 56.579,34.531 54.021,34.531 54.021,35.521 48.821,35.521 47.831,35.521 47.831,43.821
RoomDefinition STP7 [InComponentClass('STP7')] p24: confinementstyle=ConfineIn formatcopy=TRUE lockcomponents=FALSE outline 33.996,43.821 33.996,50.379 47.754,50.379 47.754,43.821 46.179,43.821 46.179,39.271 46.179,34.771 43.879,34.771 43.879,34.531 41.321,34.531 41.321,35.521 36.121,35.521 35.131,35.521 35.131,43.821
RoomDefinition STP6 [InComponentClass('STP6')] p25: confinementstyle=ConfineIn formatcopy=TRUE lockcomponents=FALSE outline 21.296,43.821 21.296,50.379 35.054,50.379 35.054,43.821 33.479,43.821 33.479,39.271 33.479,34.771 31.179,34.771 31.179,34.531 28.621,34.531 28.621,35.521 23.421,35.521 22.431,35.521 22.431,43.821
RoomDefinition STP5 [InComponentClass('STP5')] p26: confinementstyle=ConfineIn formatcopy=TRUE lockcomponents=FALSE outline 8.596,43.821 8.596,50.379 22.354,50.379 22.354,43.821 20.779,43.821 20.779,39.271 20.779,34.771 18.479,34.771 18.479,34.531 15.921,34.531 15.921,35.521 10.721,35.521 9.731,35.521 9.731,43.821
RoomDefinition STP4 [InComponentClass('STP4')] p27: confinementstyle=ConfineIn formatcopy=TRUE lockcomponents=FALSE outline 46.696,58.521 46.696,65.079 60.454,65.079 60.454,58.521 58.879,58.521 58.879,53.971 58.879,49.471 56.579,49.471 56.579,49.231 54.021,49.231 54.021,50.221 48.821,50.221 47.831,50.221 47.831,58.521
RoomDefinition STP3 [InComponentClass('STP3')] p28: confinementstyle=ConfineIn formatcopy=TRUE lockcomponents=FALSE outline 33.996,58.521 33.996,65.079 47.754,65.079 47.754,58.521 46.179,58.521 46.179,53.971 46.179,49.471 43.879,49.471 43.879,49.231 41.321,49.231 41.321,50.221 36.121,50.221 35.131,50.221 35.131,58.521
RoomDefinition STP2 [InComponentClass('STP2')] p29: confinementstyle=ConfineIn formatcopy=TRUE lockcomponents=FALSE outline 21.296,58.521 21.296,65.079 35.054,65.079 35.054,58.521 33.479,58.521 33.479,53.971 33.479,49.471 31.179,49.471 31.179,49.231 28.621,49.231 28.621,50.221 23.421,50.221 22.431,50.221 22.431,58.521
RoomDefinition STP1 [InComponentClass('STP1')] p30: confinementstyle=ConfineIn formatcopy=TRUE lockcomponents=FALSE outline 7.571,49.321 7.571,54.479 7.571,59.079 8.596,59.079 8.596,65.079 22.354,65.079 22.354,58.521 20.779,58.521 20.779,53.971 20.779,49.471 18.479,49.471 18.479,49.231 13.279,49.231 10.721,49.231 10.721,49.321
RoutingCorners [All] p1: isadvanced=TRUE cornerstyle=45-Degree minsetback=2.54 maxsetback=2.54
RoutingPriority [All] p1: isadvanced=TRUE routingpriority=0
RoutingVias [All] p1: holewidth=0.4 width=0.55 viastyle="Through Hole" minholewidth=0.3 minwidth=0.45 maxholewidth=0.5 maxwidth=0.65
ShortCircuit [All] p1: isadvanced=TRUE allowed=FALSE
SilkToSilkClearance [All] p1: isadvanced=TRUE silktosilkclearance=0.127
SilkToSolderMaskClearance [IsPad] p1: isadvanced=TRUE minsilkscreentomaskgap=0.127 clearancetoexposedcopper=TRUE
SolderMaskExpansion SolderMaskExpansion_via [IsVia] p1: isadvanced=TRUE expansion=0.102 istentingtop=TRUE useseparateexpansions=TRUE expansionbottom=0.102 istentingbottom=TRUE
SolderMaskExpansion [All] p2: isadvanced=TRUE expansion=0.05 istentingtop=FALSE
SupplyNets "Schematic Supply Nets_2" [InNet('5V0_USB')] p1: voltage=0.000
SupplyNets "Schematic Supply Nets_1" [InNet('GND')] p2: voltage=0.000
SupplyNets "Schematic Supply Nets" [InNet('3V3_LOGIC')] p3: voltage=0.000
SupplyNets "Schematic Supply Nets_8" [InNet('24V_MAIN')] p4: voltage=0.000
SupplyNets "Schematic Supply Nets_6" [InNet('3V3_MCU')] p5: voltage=0.000
SupplyNets "Schematic Supply Nets_5" [InNet('24V_IN')] p6: voltage=0.000
SupplyNets "Schematic Supply Nets_4" [InNet('5V0_LOGIC')] p7: voltage=0.000
UnRoutedNet [All] p1: isadvanced=TRUE
Width Width_S50 [InNetClass('S50')] p1: maxlimit=0.161 minlimit=0.13 preferedwidth=0.14 toplayer_minwidth=0.161 toplayer_prefwidth=0.161 midlayer1_maxwidth=0.13 midlayer1_prefwidth=0.13 midlayer2_maxwidth=0.13 midlayer2_prefwidth=0.13 midlayer3_minwidth=0.14 midlayer3_maxwidth=0.14 midlayer4_minwidth=0.14 midlayer4_maxwidth=0.14 bottomlayer_minwidth=0.161 bottomlayer_prefwidth=0.161 impedanceprofiledriven=TRUE impedanceprofileid={E0B18EE9-C4BF-4993-8942-06E30D151410} impedanceprofilevalue=50.000000 minimp=50.000000 maximp=50.000000 favimp=50.000000
Width [All] p2: maxlimit=0.5 minlimit=0.127 preferedwidth=0.254
4 further rules are at their usual default settings.

## Classes and differential pairs
differential pair class USB: USB_DATA
differential pair class D100_ENET: ENET_100BASETX_RX ENET_100BASETX_TX ENET_100M_RD ENET_100M_TD
component class PRES: C1_PRES C2_PRES C3_PRES C4_PRES R1_PRES R2_PRES U1_PRES U2_PRES
component class COIL8: C_COIL8 D_COIL8 J_COIL8 Q_COIL8
component class COIL7: C_COIL7 D_COIL7 J_COIL7 Q_COIL7
component class COIL5: C_COIL5 D_COIL5 J_COIL5 Q_COIL5
component class COIL4: C_COIL4 D_COIL4 J_COIL4 Q_COIL4
component class COIL3: C_COIL3 D_COIL3 J_COIL3 Q_COIL3
component class COIL2: C_COIL2 D_COIL2 J_COIL2 Q_COIL2
component class COIL1: C_COIL1 D_COIL1 J_COIL1 Q_COIL1
component class BTN6: C1_BTN6 J_BTN6 R1_BTN6 R2_BTN6
differential pair class CAN: CAN_CAN0 CAN_CAN1
channel class coil_driver: COIL1 COIL2 COIL3 COIL4 COIL5 COIL6 COIL7 COIL8
channel class CAN_PHY: CAN0 CAN1
channel class button_input: BTN1 BTN2 BTN3 BTN4 BTN5 BTN6 BTN7 BTN8
channel class 3V3_LDO_1A: LDO1 LDO2
net class HV_24V: 24V_IN 24V_MAIN
component class U_Input_Protection: C1_IP C2_IP C3_IP C4_IP C5_IP Q1_IP Q2_IP R1_IP R2_IP R3_IP R4_IP R5_IP R6_IP U1_IP
component class U_5V_Buck: C5_PWR C6_PWR C7_PWR C8_PWR C9_PWR C10_PWR C11_PWR L1_PWR U2_PWR
component class Top: C1 J1 J1_I2C J2 J2_I2C R1 R3 R4 U1
component class PWR: C12_PWR C13_PWR C14_PWR C15_PWR C16_PWR C17_PWR C18_PWR C19_PWR C20_PWR C21_PWR C22_PWR C23_PWR J1_PWR R1_PWR R2_PWR R3_PWR R4_PWR R5_PWR R6_PWR R7_PWR R8_PWR R9_PWR R10_PWR R11_PWR R12_PWR U3_PWR
component class LDO2: C1_PWR_LDO2 C2_PWR_LDO2 C3_PWR_LDO2 C4_PWR_LDO2 U1_PWR_LDO2
component class LDO1: C1_PWR_LDO1 C2_PWR_LDO1 C3_PWR_LDO1 C4_PWR_LDO1 U1_PWR_LDO1
component class ENET: C1_ENET C2_ENET C3_ENET C4_ENET C5_ENET C6_ENET C7_ENET C8_ENET C9_ENET C10_ENET C11_ENET C12_ENET C13_ENET C14_ENET C15_ENET D1_ENET D2_ENET J1_ENET R1_ENET R2_ENET R3_ENET R4_ENET R6_ENET R7_ENET R8_ENET R9_ENET R10_ENET R11_ENET R12_ENET R14_ENET R16_ENET R17_ENET R18_ENET R19_ENET R20_ENET R21_ENET R22_ENET R23_ENET R24_ENET R25_ENET R26_ENET R27_ENET R28_ENET R29_ENET R30_ENET R31_ENET R32_ENET R33_ENET R34_ENET R35_ENET R36_ENET U1_ENET Y1_ENET
component class BTN8: C1_BTN8 J_BTN8 R1_BTN8 R2_BTN8
component class BTN7: C1_BTN7 J_BTN7 R1_BTN7 R2_BTN7
component class COIL6: C_COIL6 D_COIL6 J_COIL6 Q_COIL6
component class BTN5: C1_BTN5 J_BTN5 R1_BTN5 R2_BTN5
component class BTN4: C1_BTN4 J_BTN4 R1_BTN4 R2_BTN4
component class BTN3: C1_BTN3 J_BTN3 R1_BTN3 R2_BTN3
component class BTN2: C1_BTN2 J_BTN2 R1_BTN2 R2_BTN2
component class BTN1: C1_BTN1 J_BTN1 R1_BTN1 R2_BTN1
component class CAN1: C1_CAN1 C2_CAN1 C3_CAN1 J_CAN1 R1_CAN1 R2_CAN1 TVS1_CAN1 U1_CAN1
component class CAN0: C1_CAN0 C2_CAN0 C3_CAN0 J_CAN0 R1_CAN0 R2_CAN0 TVS1_CAN0 U1_CAN0
net class S50: RMII_MAC_TO_PHY_D0 RMII_MAC_TO_PHY_D0_R RMII_MAC_TO_PHY_D1 RMII_MAC_TO_PHY_D1_R RMII_MAC_TO_PHY_EN RMII_MAC_TO_PHY_EN_R RMII_PHY_TO_MAC_CLK RMII_PHY_TO_MAC_CLK_R RMII_PHY_TO_MAC_D0 RMII_PHY_TO_MAC_D0_R RMII_PHY_TO_MAC_D1 RMII_PHY_TO_MAC_D1_R RMII_PHY_TO_MAC_DV RMII_PHY_TO_MAC_DV_R
component class MCU: B1_MCU C1_MCU C2_MCU C3_MCU C4_MCU C5_MCU C7_MCU C8_MCU C9_MCU C10_MCU C11_MCU C12_MCU C13_MCU C14_MCU C15_MCU C16_MCU C17_MCU C18_MCU C19_MCU D1_MCU D2_MCU J1_MCU R1_MCU R2_MCU R3_MCU R4_MCU R5_MCU R6_MCU R7_MCU R8_MCU R9_MCU R10_MCU R11_MCU R13_MCU U1_MCU Y1_MCU Y2_MCU
channel class stepper_driver: STP1 STP2 STP3 STP4 STP5 STP6 STP7 STP8
component class STP1: C1_STP1 C2_STP1 C3_STP1 C4_STP1 C5_STP1 C6_STP1 C7_STP1 C8_STP1 C9_STP1 C10_STP1 J_STP1 R1_STP1 R2_STP1 U2_STP1
component class STP2: C1_STP2 C2_STP2 C3_STP2 C4_STP2 C5_STP2 C6_STP2 C7_STP2 C8_STP2 C9_STP2 C10_STP2 J_STP2 R1_STP2 R2_STP2 U2_STP2
component class STP3: C1_STP3 C2_STP3 C3_STP3 C4_STP3 C5_STP3 C6_STP3 C7_STP3 C8_STP3 C9_STP3 C10_STP3 J_STP3 R1_STP3 R2_STP3 U2_STP3
component class STP4: C1_STP4 C2_STP4 C3_STP4 C4_STP4 C5_STP4 C6_STP4 C7_STP4 C8_STP4 C9_STP4 C10_STP4 J_STP4 R1_STP4 R2_STP4 U2_STP4
component class STP5: C1_STP5 C2_STP5 C3_STP5 C4_STP5 C5_STP5 C6_STP5 C7_STP5 C8_STP5 C9_STP5 C10_STP5 J_STP5 R1_STP5 R2_STP5 U2_STP5
component class STP6: C1_STP6 C2_STP6 C3_STP6 C4_STP6 C5_STP6 C6_STP6 C7_STP6 C8_STP6 C9_STP6 C10_STP6 J_STP6 R1_STP6 R2_STP6 U2_STP6
component class STP7: C1_STP7 C2_STP7 C3_STP7 C4_STP7 C5_STP7 C6_STP7 C7_STP7 C8_STP7 C9_STP7 C10_STP7 J_STP7 R1_STP7 R2_STP7 U2_STP7
component class STP8: C1_STP8 C2_STP8 C3_STP8 C4_STP8 C5_STP8 C6_STP8 C7_STP8 C8_STP8 C9_STP8 C10_STP8 J_STP8 R1_STP8 R2_STP8 U2_STP8
differential pair USB_DATA: +USB_DATA_P -USB_DATA_N
differential pair CAN_CAN1: +CAN_CAN1_H -CAN_CAN1_L
differential pair CAN_CAN0: +CAN_CAN0_H -CAN_CAN0_L
differential pair ENET_100M_TD: +ENET_100M_TD_P -ENET_100M_TD_N
differential pair ENET_100M_RD: +ENET_100M_RD_P -ENET_100M_RD_N
differential pair ENET_100BASETX_TX: +ENET_100BASETX_TX_P -ENET_100BASETX_TX_N
differential pair ENET_100BASETX_RX: +ENET_100BASETX_RX_P -ENET_100BASETX_RX_N

## Components (designator, comment, footprint, x,y, rotation, side; value= is the part's Value field where it differs from the comment)
B1_MCU "MS920SE FL27E" MS920SE-FL27E 32.75,28.4 r270 top
C1 "GRT155R71H104KE01D" "Generic 0402 capacitor" 46.6,9 r180 top value=100nF
C1_BTN1 "GRT155R71H104KE01D" "Generic 0402 capacitor" 64.9,49.1 r180 bottom value=100nF (schematic designator C1)
C1_BTN2 "GRT155R71H104KE01D" "Generic 0402 capacitor" 70.1,49.1 r180 bottom value=100nF (schematic designator C1)
C1_BTN3 "GRT155R71H104KE01D" "Generic 0402 capacitor" 75.3,49.1 r180 bottom value=100nF (schematic designator C1)
C1_BTN4 "GRT155R71H104KE01D" "Generic 0402 capacitor" 80.5,49.1 r180 bottom value=100nF (schematic designator C1)
C1_BTN5 "GRT155R71H104KE01D" "Generic 0402 capacitor" 64.9,43.5 r180 bottom value=100nF (schematic designator C1)
C1_BTN6 "GRT155R71H104KE01D" "Generic 0402 capacitor" 70.1,43.5 r180 bottom value=100nF (schematic designator C1)
C1_BTN7 "GRT155R71H104KE01D" "Generic 0402 capacitor" 75.3,43.5 r180 bottom value=100nF (schematic designator C1)
C1_BTN8 "GRT155R71H104KE01D" "Generic 0402 capacitor" 80.5,43.5 r180 bottom value=100nF (schematic designator C1)
C1_CAN0 "GRT155R71H104KE01D" "Generic 0402 capacitor" 89.2,51.3 r180 bottom value=100nF (schematic designator C1)
C1_CAN1 "GRT155R71H104KE01D" "Generic 0402 capacitor" 89.2,44.1 r180 bottom value=100nF (schematic designator C1)
C1_ENET "GRT155R71H104KE01D" "Generic 0402 capacitor" 67.8,32.15 r270 top value=100nF
C1_IP "UWZ1V101MCL1GS" UWZ1V101MCL1GS 13.8,6.1 r180 top value=100µF
C1_MCU "GRT155R71H104KE01D" "Generic 0402 capacitor" 39.2,27.6 r0 bottom value=100nF
C1_PRES "GRT155R71H104KE01D" "Generic 0402 capacitor" 90.2,33.8 r0 bottom value=100nF
C1_PWR_LDO1 "GRT155R61A475ME13D" "Generic 0402 capacitor" 38.2,8.2 r270 bottom value=4.7µF (schematic designator C1_PWR)
C1_PWR_LDO2 "GRT155R61A475ME13D" "Generic 0402 capacitor" 37.7,5.3 r0 bottom value=4.7µF (schematic designator C1_PWR)
C1_STP1 "GRT155R71H104KE01D" "Generic 0402 capacitor" 12,57.2 r0 bottom value=100nF (schematic designator C1)
C1_STP2 "GRT155R71H104KE01D" "Generic 0402 capacitor" 24.9,57.2 r0 bottom value=100nF (schematic designator C1)
C1_STP3 "GRT155R71H104KE01D" "Generic 0402 capacitor" 37.8,57.2 r0 bottom value=100nF (schematic designator C1)
C1_STP4 "GRT155R71H104KE01D" "Generic 0402 capacitor" 50.7,57.2 r0 bottom value=100nF (schematic designator C1)
C1_STP5 "GRT155R71H104KE01D" "Generic 0402 capacitor" 12,42.5 r0 bottom value=100nF (schematic designator C1)
C1_STP6 "GRT155R71H104KE01D" "Generic 0402 capacitor" 24.9,42.5 r0 bottom value=100nF (schematic designator C1)
C1_STP7 "GRT155R71H104KE01D" "Generic 0402 capacitor" 37.8,42.5 r0 bottom value=100nF (schematic designator C1)
C1_STP8 "GRT155R71H104KE01D" "Generic 0402 capacitor" 50.7,42.5 r0 bottom value=100nF (schematic designator C1)
C2_CAN0 "GRT155R71H104KE01D" "Generic 0402 capacitor" 87.2,51.3 r0 bottom value=100nF (schematic designator C2)
C2_CAN1 "GRT155R71H104KE01D" "Generic 0402 capacitor" 87.2,44.1 r0 bottom value=100nF (schematic designator C2)
C2_ENET "GRT155R71H104KE01D" "Generic 0402 capacitor" 68.8,32.15 r270 top value=100nF
C2_IP "12061C225K4T2A" "Generic 1206 Capacitor" 12.7,12.6 r270 bottom value=2.2µF
C2_MCU "GCM1555C1H7R0CA16J" "Generic 0402 capacitor" 43.1,29.2 r180 bottom value=7pF
C2_PRES "GRT155R71H104KE01D" "Generic 0402 capacitor" 89.7,35.3 r270 bottom value=100nF
C2_PWR_LDO1 "GCM155R71C224ME02D" "Generic 0402 capacitor" 37.7,9.7 r0 bottom value=220nF (schematic designator C2_PWR)
C2_PWR_LDO2 "GCM155R71C224ME02D" "Generic 0402 capacitor" 38.2,3.8 r270 bottom value=220nF (schematic designator C2_PWR)
C2_STP1 "GRT155R71H104KE01D" "Generic 0402 capacitor" 16.2,57.2 r180 bottom value=100nF (schematic designator C2)
C2_STP2 "GRT155R71H104KE01D" "Generic 0402 capacitor" 29.1,57.2 r180 bottom value=100nF (schematic designator C2)
C2_STP3 "GRT155R71H104KE01D" "Generic 0402 capacitor" 42,57.2 r180 bottom value=100nF (schematic designator C2)
C2_STP4 "GRT155R71H104KE01D" "Generic 0402 capacitor" 54.9,57.2 r180 bottom value=100nF (schematic designator C2)
C2_STP5 "GRT155R71H104KE01D" "Generic 0402 capacitor" 16.2,42.5 r180 bottom value=100nF (schematic designator C2)
C2_STP6 "GRT155R71H104KE01D" "Generic 0402 capacitor" 29.1,42.5 r180 bottom value=100nF (schematic designator C2)
C2_STP7 "GRT155R71H104KE01D" "Generic 0402 capacitor" 42,42.5 r180 bottom value=100nF (schematic designator C2)
C2_STP8 "GRT155R71H104KE01D" "Generic 0402 capacitor" 54.9,42.5 r180 bottom value=100nF (schematic designator C2)
C3_CAN0 "GCM155R72A472KA37D" "Generic 0402 capacitor" 85.3,50.3 r90 bottom value=4.7nF (schematic designator C3)
C3_CAN1 "GCM155R72A472KA37D" "Generic 0402 capacitor" 85.3,43.1 r90 bottom value=4.7nF (schematic designator C3)
C3_ENET "GRT155C80J106ME13J" "Generic 0402 capacitor" 70.3,23.75 r90 bottom value=10µF
C3_IP "12061C225K4T2A" "Generic 1206 Capacitor" 15,12.6 r270 bottom value=2.2µF
C3_MCU "GCM1555C1H7R0CA16J" "Generic 0402 capacitor" 45.1,29.2 r0 bottom value=7pF
C3_PRES "GRT155R71H104KE01D" "Generic 0402 capacitor" 90.2,25 r0 bottom value=100nF
C3_PWR_LDO1 "GCM155R71C224ME02D" "Generic 0402 capacitor" 36.2,8.2 r270 bottom value=220nF (schematic designator C3_PWR)
C3_PWR_LDO2 "GCM155R71C224ME02D" "Generic 0402 capacitor" 36.2,3.8 r270 bottom value=220nF (schematic designator C3_PWR)
C3_STP1 "GRT155R71H104KE01D" "Generic 0402 capacitor" 16.2,58.2 r180 bottom value=100nF (schematic designator C3)
C3_STP2 "GRT155R71H104KE01D" "Generic 0402 capacitor" 29.1,58.2 r180 bottom value=100nF (schematic designator C3)
C3_STP3 "GRT155R71H104KE01D" "Generic 0402 capacitor" 42,58.2 r180 bottom value=100nF (schematic designator C3)
C3_STP4 "GRT155R71H104KE01D" "Generic 0402 capacitor" 54.9,58.2 r180 bottom value=100nF (schematic designator C3)
C3_STP5 "GRT155R71H104KE01D" "Generic 0402 capacitor" 16.2,43.5 r180 bottom value=100nF (schematic designator C3)
C3_STP6 "GRT155R71H104KE01D" "Generic 0402 capacitor" 29.1,43.5 r180 bottom value=100nF (schematic designator C3)
C3_STP7 "GRT155R71H104KE01D" "Generic 0402 capacitor" 42,43.5 r180 bottom value=100nF (schematic designator C3)
C3_STP8 "GRT155R71H104KE01D" "Generic 0402 capacitor" 54.9,43.5 r180 bottom value=100nF (schematic designator C3)
C4_ENET "MAASL105CD7105MFCA01" "Generic 0402 capacitor" 72.7,31.65 r180 top value=1µF
C4_IP "GCM155R71C224ME02D" "Generic 0402 capacitor" 23.7,12.2 r270 bottom value=220nF
C4_MCU "GRT1555C1E120JA02J" "Generic 0402 capacitor" 40.7,25.1 r270 bottom value=12pF
C4_PRES "GRT155R71H104KE01D" "Generic 0402 capacitor" 89.7,26.5 r270 bottom value=100nF
C4_PWR_LDO1 "GRT155R61A475ME13D" "Generic 0402 capacitor" 37.2,8.2 r270 bottom value=4.7µF (schematic designator C4_PWR)
C4_PWR_LDO2 "GRT155R61A475ME13D" "Generic 0402 capacitor" 37.2,3.8 r270 bottom value=4.7µF (schematic designator C4_PWR)
C4_STP1 "GRT155R71H104KE01D" "Generic 0402 capacitor" 17.7,51.5 r270 bottom value=100nF (schematic designator C4)
C4_STP2 "GRT155R71H104KE01D" "Generic 0402 capacitor" 30.6,51.5 r270 bottom value=100nF (schematic designator C4)
C4_STP3 "GRT155R71H104KE01D" "Generic 0402 capacitor" 43.5,51.5 r270 bottom value=100nF (schematic designator C4)
C4_STP4 "GRT155R71H104KE01D" "Generic 0402 capacitor" 56.4,51.5 r270 bottom value=100nF (schematic designator C4)
C4_STP5 "GRT155R71H104KE01D" "Generic 0402 capacitor" 17.7,36.8 r270 bottom value=100nF (schematic designator C4)
C4_STP6 "GRT155R71H104KE01D" "Generic 0402 capacitor" 30.6,36.8 r270 bottom value=100nF (schematic designator C4)
C4_STP7 "GRT155R71H104KE01D" "Generic 0402 capacitor" 43.5,36.8 r270 bottom value=100nF (schematic designator C4)
C4_STP8 "GRT155R71H104KE01D" "Generic 0402 capacitor" 56.4,36.8 r270 bottom value=100nF (schematic designator C4)
C5_ENET "GRT155R71H104KE01D" "Generic 0402 capacitor" 73.7,31.75 r270 bottom value=100nF
C5_IP "GCM155R72A152KA37D" "Generic 0402 capacitor" 23.8,14.2 r90 bottom value=1.5nF
C5_MCU "GRT1555C1E120JA02J" "Generic 0402 capacitor" 45,25.6 r180 bottom value=12pF
C5_PWR "MAASL105CD7105MFCA01" "Generic 0402 capacitor" 29.7,14.9 r270 top value=1µF
C5_STP1 "GRT155R71H104KE01D" "Generic 0402 capacitor" 12,50 r180 bottom value=100nF (schematic designator C5)
C5_STP2 "GRT155R71H104KE01D" "Generic 0402 capacitor" 24.9,50 r180 bottom value=100nF (schematic designator C5)
C5_STP3 "GRT155R71H104KE01D" "Generic 0402 capacitor" 37.8,50 r180 bottom value=100nF (schematic designator C5)
C5_STP4 "GRT155R71H104KE01D" "Generic 0402 capacitor" 50.7,50 r180 bottom value=100nF (schematic designator C5)
C5_STP5 "GRT155R71H104KE01D" "Generic 0402 capacitor" 12,35.3 r180 bottom value=100nF (schematic designator C5)
C5_STP6 "GRT155R71H104KE01D" "Generic 0402 capacitor" 24.9,35.3 r180 bottom value=100nF (schematic designator C5)
C5_STP7 "GRT155R71H104KE01D" "Generic 0402 capacitor" 37.8,35.3 r180 bottom value=100nF (schematic designator C5)
C5_STP8 "GRT155R71H104KE01D" "Generic 0402 capacitor" 50.7,35.3 r180 bottom value=100nF (schematic designator C5)
C6_ENET "GCM155R72A102KA37J" "Generic 0402 capacitor" 69.3,23.75 r90 bottom value=1nF
C6_PWR "MAASL105CD7105MFCA01" "Generic 0402 capacitor" 25,15.8 r90 top value=1µF
C6_STP1 "GRT155R61A475ME13D" "Generic 0402 capacitor" 17.2,50 r180 bottom value=4.7µF (schematic designator C6)
C6_STP2 "GRT155R61A475ME13D" "Generic 0402 capacitor" 30.1,50 r180 bottom value=4.7µF (schematic designator C6)
C6_STP3 "GRT155R61A475ME13D" "Generic 0402 capacitor" 43,50 r180 bottom value=4.7µF (schematic designator C6)
C6_STP4 "GRT155R61A475ME13D" "Generic 0402 capacitor" 55.9,50 r180 bottom value=4.7µF (schematic designator C6)
C6_STP5 "GRT155R61A475ME13D" "Generic 0402 capacitor" 17.2,35.3 r180 bottom value=4.7µF (schematic designator C6)
C6_STP6 "GRT155R61A475ME13D" "Generic 0402 capacitor" 30.1,35.3 r180 bottom value=4.7µF (schematic designator C6)
C6_STP7 "GRT155R61A475ME13D" "Generic 0402 capacitor" 43,35.3 r180 bottom value=4.7µF (schematic designator C6)
C6_STP8 "GRT155R61A475ME13D" "Generic 0402 capacitor" 55.9,35.3 r180 bottom value=4.7µF (schematic designator C6)
C7_ENET "GRT155R71H104KE01D" "Generic 0402 capacitor" 69.8,32.15 r270 top value=100nF
C7_MCU "MAASJ105CD7225MFCA01" "Generic 0402 capacitor" 59.9,30.3 r270 top value=2.2µF
C7_PWR "GRT21BD71A226ME13L" "Generic 0805 Cap" 26.6,17.7 r180 bottom value=22µF
C7_STP1 "GRM155R71H473KE14D" "Generic 0402 capacitor" 17.7,53.5 r90 bottom value=47nF (schematic designator C7)
C7_STP2 "GRM155R71H473KE14D" "Generic 0402 capacitor" 30.6,53.5 r90 bottom value=47nF (schematic designator C7)
C7_STP3 "GRM155R71H473KE14D" "Generic 0402 capacitor" 43.5,53.5 r90 bottom value=47nF (schematic designator C7)
C7_STP4 "GRM155R71H473KE14D" "Generic 0402 capacitor" 56.4,53.5 r90 bottom value=47nF (schematic designator C7)
C7_STP5 "GRM155R71H473KE14D" "Generic 0402 capacitor" 17.7,38.8 r90 bottom value=47nF (schematic designator C7)
C7_STP6 "GRM155R71H473KE14D" "Generic 0402 capacitor" 30.6,38.8 r90 bottom value=47nF (schematic designator C7)
C7_STP7 "GRM155R71H473KE14D" "Generic 0402 capacitor" 43.5,38.8 r90 bottom value=47nF (schematic designator C7)
C7_STP8 "GRM155R71H473KE14D" "Generic 0402 capacitor" 56.4,38.8 r90 bottom value=47nF (schematic designator C7)
C8_ENET "GRT155R71H104KE01D" "Generic 0402 capacitor" 70.8,32.15 r270 top value=100nF
C8_MCU "MAASJ105CD7225MFCA01" "Generic 0402 capacitor" 56.4,15.4 r180 top value=2.2µF
C8_PWR "GRT21BD71A226ME13L" "Generic 0805 Cap" 26.6,19.6 r180 bottom value=22µF
C8_STP1 "CL31A106MBHNNNE" "Generic 1206 Capacitor" 9.5,54.3 r90 top value=10µF (schematic designator C8)
C8_STP2 "CL31A106MBHNNNE" "Generic 1206 Capacitor" 22.4,54.3 r90 top value=10µF (schematic designator C8)
C8_STP3 "CL31A106MBHNNNE" "Generic 1206 Capacitor" 35.3,54.3 r90 top value=10µF (schematic designator C8)
C8_STP4 "CL31A106MBHNNNE" "Generic 1206 Capacitor" 48.2,54.3 r90 top value=10µF (schematic designator C8)
C8_STP5 "CL31A106MBHNNNE" "Generic 1206 Capacitor" 9.5,39.6 r90 top value=10µF (schematic designator C8)
C8_STP6 "CL31A106MBHNNNE" "Generic 1206 Capacitor" 22.4,39.6 r90 top value=10µF (schematic designator C8)
C8_STP7 "CL31A106MBHNNNE" "Generic 1206 Capacitor" 35.3,39.6 r90 top value=10µF (schematic designator C8)
C8_STP8 "CL31A106MBHNNNE" "Generic 1206 Capacitor" 48.2,39.6 r90 top value=10µF (schematic designator C8)
C9_ENET "GRT155C80J106ME13J" "Generic 0402 capacitor" 67.7,23.45 r0 top value=10µF
C9_MCU "GRT155C80J106ME13J" "Generic 0402 capacitor" 58.4,29.2 r180 bottom value=10µF
C9_PWR "GRT155R71H104KE01D" "Generic 0402 capacitor" 25.3,12.4 r270 top value=100nF
C9_STP1 "CL31A106MBHNNNE" "Generic 1206 Capacitor" 9,56.5 r270 bottom value=10µF (schematic designator C9)
C9_STP2 "CL31A106MBHNNNE" "Generic 1206 Capacitor" 21.9,56.5 r270 bottom value=10µF (schematic designator C9)
C9_STP3 "CL31A106MBHNNNE" "Generic 1206 Capacitor" 34.8,56.5 r270 bottom value=10µF (schematic designator C9)
C9_STP4 "CL31A106MBHNNNE" "Generic 1206 Capacitor" 47.7,56.5 r270 bottom value=10µF (schematic designator C9)
C9_STP5 "CL31A106MBHNNNE" "Generic 1206 Capacitor" 9,41.8 r270 bottom value=10µF (schematic designator C9)
C9_STP6 "CL31A106MBHNNNE" "Generic 1206 Capacitor" 21.9,41.8 r270 bottom value=10µF (schematic designator C9)
C9_STP7 "CL31A106MBHNNNE" "Generic 1206 Capacitor" 34.8,41.8 r270 bottom value=10µF (schematic designator C9)
C9_STP8 "CL31A106MBHNNNE" "Generic 1206 Capacitor" 47.7,41.8 r270 bottom value=10µF (schematic designator C9)
C10_ENET "MAASL105CD7105MFCA01" "Generic 0402 capacitor" 67.7,22.45 r0 top value=1µF
C10_MCU "MAASJ105CD7225MFCA01" "Generic 0402 capacitor" 44.1,32.3 r90 bottom value=2.2µF
C10_PWR "12061C225K4T2A" "Generic 1206 Capacitor" 28,12.7 r180 top value=2.2µF
C10_STP1 "CL31A106MBHNNNE" "Generic 1206 Capacitor" 9,51.9 r90 bottom value=10µF (schematic designator C10)
C10_STP2 "CL31A106MBHNNNE" "Generic 1206 Capacitor" 21.9,51.9 r90 bottom value=10µF (schematic designator C10)
C10_STP3 "CL31A106MBHNNNE" "Generic 1206 Capacitor" 34.8,51.9 r90 bottom value=10µF (schematic designator C10)
C10_STP4 "CL31A106MBHNNNE" "Generic 1206 Capacitor" 47.7,51.9 r90 bottom value=10µF (schematic designator C10)
C10_STP5 "CL31A106MBHNNNE" "Generic 1206 Capacitor" 9,37.2 r90 bottom value=10µF (schematic designator C10)
C10_STP6 "CL31A106MBHNNNE" "Generic 1206 Capacitor" 21.9,37.2 r90 bottom value=10µF (schematic designator C10)
C10_STP7 "CL31A106MBHNNNE" "Generic 1206 Capacitor" 34.8,37.2 r90 bottom value=10µF (schematic designator C10)
C10_STP8 "CL31A106MBHNNNE" "Generic 1206 Capacitor" 47.7,37.2 r90 bottom value=10µF (schematic designator C10)
C11_ENET "GRT155R71H104KE01D" "Generic 0402 capacitor" 66.2,23.75 r90 top value=100nF
C11_MCU "MAASJ105CD7225MFCA01" "Generic 0402 capacitor" 44.2,16.9 r270 bottom value=2.2µF
C11_PWR "12061C225K4T2A" "Generic 1206 Capacitor" 29.1,12.7 r180 bottom value=2.2µF
C12_ENET "GCM155R72A102KA37J" "Generic 0402 capacitor" 74.7,31.15 r270 bottom value=1nF
C12_MCU "MAASJ105CD7225MFCA01" "Generic 0402 capacitor" 55.4,16.9 r270 bottom value=2.2µF
C12_PWR "GRT155R71H104KE01D" "Generic 0402 capacitor" 48.875,25.675 r0 bottom value=100nF
C13_ENET "GRT1555C1E120JA02J" "Generic 0402 capacitor" 65.2,27.75 r90 top value=12pF
C13_MCU "GRT155R71H104KE01D" "Generic 0402 capacitor" 45.1,32.3 r90 bottom value=100nF
C13_PWR "GRT155R71H104KE01D" "Generic 0402 capacitor" 50.875,25.675 r0 bottom value=100nF
C14_ENET "GRT1555C1E120JA02J" "Generic 0402 capacitor" 64.2,27.75 r90 top value=12pF
C14_MCU "GRT155R71H104KE01D" "Generic 0402 capacitor" 43,25.6 r180 bottom value=100nF
C14_PWR "GRT155R71H104KE01D" "Generic 0402 capacitor" 52.875,25.675 r0 bottom value=100nF
C15_ENET "CGA2B2X7R1H222K050BA" "Generic 0402 capacitor" 72.7,30.65 r180 top value=2.2nF
C15_MCU "GRT155R71H104KE01D" "Generic 0402 capacitor" 45.2,16.9 r270 bottom value=100nF
C15_PWR "GRT155R71H104KE01D" "Generic 0402 capacitor" 52.875,22.875 r0 bottom value=100nF
C16_MCU "GRT155R71H104KE01D" "Generic 0402 capacitor" 56.4,16.9 r270 bottom value=100nF
C16_PWR "GRT155R71H104KE01D" "Generic 0402 capacitor" 50.875,22.875 r0 bottom value=100nF
C17_MCU "GRT155R71H104KE01D" "Generic 0402 capacitor" 58.4,30.2 r180 bottom value=100nF
C17_PWR "UWZ1V101MCL1GS" UWZ1V101MCL1GS 4.5,51.7 r90 top value=100µF
C18_MCU "GRT155R71H104KE01D" "Generic 0402 capacitor" 42.7,19.8 r90 bottom value=100nF
C18_PWR "UWZ1V101MCL1GS" UWZ1V101MCL1GS 4.5,41.8 r90 top value=100µF
C19_MCU "GRT155R71H104KE01D" "Generic 0402 capacitor" 40.5,29.1 r270 bottom value=100nF
C19_PWR "UWZ1V101MCL1GS" UWZ1V101MCL1GS 13.4,30.9 r0 top value=100µF
C20_PWR "UWZ1V101MCL1GS" UWZ1V101MCL1GS 4.5,31.9 r90 top value=100µF
C21_PWR "MAASL105CD7105MFCA01" "Generic 0402 capacitor" 29.9,9.3 r90 top value=1µF
C22_PWR "GRT21BD71A226ME13L" "Generic 0805 Cap" 32.1,8.7 r180 top value=22µF
C23_PWR "GRT21BD71A226ME13L" "Generic 0805 Cap" 32.1,10.6 r180 top value=22µF
C_COIL1 "CGA3E3X7R1H105K080AB" "Generic 0603 Capacitor" 63.2,63.6 r0 bottom value=1µF (schematic designator C)
C_COIL2 "CGA3E3X7R1H105K080AB" "Generic 0603 Capacitor" 69.3,63.6 r0 bottom value=1µF (schematic designator C)
C_COIL3 "CGA3E3X7R1H105K080AB" "Generic 0603 Capacitor" 75.4,63.6 r0 bottom value=1µF (schematic designator C)
C_COIL4 "CGA3E3X7R1H105K080AB" "Generic 0603 Capacitor" 81.5,63.6 r0 bottom value=1µF (schematic designator C)
C_COIL5 "CGA3E3X7R1H105K080AB" "Generic 0603 Capacitor" 63.2,57.9 r0 bottom value=1µF (schematic designator C)
C_COIL6 "CGA3E3X7R1H105K080AB" "Generic 0603 Capacitor" 69.3,57.9 r0 bottom value=1µF (schematic designator C)
C_COIL7 "CGA3E3X7R1H105K080AB" "Generic 0603 Capacitor" 75.4,57.9 r0 bottom value=1µF (schematic designator C)
C_COIL8 "CGA3E3X7R1H105K080AB" "Generic 0603 Capacitor" 81.5,57.9 r0 bottom value=1µF (schematic designator C)
D1_ENET "SML-D12P8WT86C" SML-D12P8WT86C 75.5,31.575 r90 top
D1_MCU "SD103BWSHE3-TP" SOD-323 37.4,28.5 r90 bottom
D2_ENET "SML-D12D8WT86C" FP-SML-D12-MFG 74.3,31.575 r90 top
D2_MCU "SML-D12V8WT86C" FP-SML-D12-MFG 38.2,22.2 r180 top
D_COIL1 "VS-10MQ100HM3/5AT" FP-95400-MFG 66.3,61 r270 bottom (schematic designator D)
D_COIL2 "VS-10MQ100HM3/5AT" FP-95400-MFG 72.4,61 r270 bottom (schematic designator D)
D_COIL3 "VS-10MQ100HM3/5AT" FP-95400-MFG 78.5,61 r270 bottom (schematic designator D)
D_COIL4 "VS-10MQ100HM3/5AT" FP-95400-MFG 84.6,61 r270 bottom (schematic designator D)
D_COIL5 "VS-10MQ100HM3/5AT" FP-95400-MFG 66.3,55.3 r270 bottom (schematic designator D)
D_COIL6 "VS-10MQ100HM3/5AT" FP-95400-MFG 72.4,55.3 r270 bottom (schematic designator D)
D_COIL7 "VS-10MQ100HM3/5AT" FP-95400-MFG 78.5,55.3 r270 bottom (schematic designator D)
D_COIL8 "VS-10MQ100HM3/5AT" FP-95400-MFG 84.6,55.3 r270 bottom (schematic designator D)
J1 "USB4105-GF-A" USB-C_USB4105-GF-A 24.2,2.7 r0 top
J1_ENET "B4B-XH-AM (LF)(SN)" FP-B4B-XH-AM_LF_SN-MFG 70,36.55 r180 top
J1_I2C "BM04B-SRSS-TB(LF)(SN)" "JST BM04B-SRSS-TB" 90.5,16.2 r0 top
J1_MCU "FTSH-107-01-L-DV-K" FTSH-107-01-L-DV-K-TR 68.47,9.24 r0 top
J1_PWR "PJ-002AH-SMT-TR" "CUI PJ-002AH-SMT-TR" 7.6,18.6 r0 top
J2 "BM05B-SRSS-TB(LF)(SN)" "JST BM05B-SRSS-TB" 79.7,5.3 r180 top
J2_I2C "BM04B-SRSS-TB(LF)(SN)" "JST BM04B-SRSS-TB" 90.5,11.3 r0 top
J_BTN1 "BM02B-SRSS-TB(LF)(SN)" "JST BM02B-SRSS-TB" 64.8,49.163 r0 top (schematic designator J)
J_BTN2 "BM02B-SRSS-TB(LF)(SN)" "JST BM02B-SRSS-TB" 70,49.163 r0 top (schematic designator J)
J_BTN3 "BM02B-SRSS-TB(LF)(SN)" "JST BM02B-SRSS-TB" 75.2,49.163 r0 top (schematic designator J)
J_BTN4 "BM02B-SRSS-TB(LF)(SN)" "JST BM02B-SRSS-TB" 80.4,49.163 r0 top (schematic designator J)
J_BTN5 "BM02B-SRSS-TB(LF)(SN)" "JST BM02B-SRSS-TB" 64.8,43.563 r0 top (schematic designator J)
J_BTN6 "BM02B-SRSS-TB(LF)(SN)" "JST BM02B-SRSS-TB" 70,43.563 r0 top (schematic designator J)
J_BTN7 "BM02B-SRSS-TB(LF)(SN)" "JST BM02B-SRSS-TB" 75.2,43.563 r0 top (schematic designator J)
J_BTN8 "BM02B-SRSS-TB(LF)(SN)" "JST BM02B-SRSS-TB" 80.4,43.563 r0 top (schematic designator J)
J_CAN0 "BM04B-SRSS-TB(LF)(SN)" "JST BM04B-SRSS-TB" 90.9,49.6 r270 top (schematic designator J)
J_CAN1 "BM04B-SRSS-TB(LF)(SN)" "JST BM04B-SRSS-TB" 90.9,42.4 r270 top (schematic designator J)
J_COIL1 "BM02B-SRSS-TB(LF)(SN)" "JST BM02B-SRSS-TB" 64.4,61.5 r180 top (schematic designator J)
J_COIL2 "BM02B-SRSS-TB(LF)(SN)" "JST BM02B-SRSS-TB" 70.5,61.5 r180 top (schematic designator J)
J_COIL3 "BM02B-SRSS-TB(LF)(SN)" "JST BM02B-SRSS-TB" 76.6,61.5 r180 top (schematic designator J)
J_COIL4 "BM02B-SRSS-TB(LF)(SN)" "JST BM02B-SRSS-TB" 82.7,61.5 r180 top (schematic designator J)
J_COIL5 "BM02B-SRSS-TB(LF)(SN)" "JST BM02B-SRSS-TB" 64.4,55.8 r180 top (schematic designator J)
J_COIL6 "BM02B-SRSS-TB(LF)(SN)" "JST BM02B-SRSS-TB" 70.5,55.8 r180 top (schematic designator J)
J_COIL7 "BM02B-SRSS-TB(LF)(SN)" "JST BM02B-SRSS-TB" 76.6,55.8 r180 top (schematic designator J)
J_COIL8 "BM02B-SRSS-TB(LF)(SN)" "JST BM02B-SRSS-TB" 82.7,55.8 r180 top (schematic designator J)
J_STP1 "B4B-XH-AM (LF)(SN)" FP-B4B-XH-AM_LF_SN-MFG 15.2,61.8 r0 top (schematic designator J)
J_STP2 "B4B-XH-AM (LF)(SN)" FP-B4B-XH-AM_LF_SN-MFG 28.1,61.8 r0 top (schematic designator J)
J_STP3 "B4B-XH-AM (LF)(SN)" FP-B4B-XH-AM_LF_SN-MFG 41,61.8 r0 top (schematic designator J)
J_STP4 "B4B-XH-AM (LF)(SN)" FP-B4B-XH-AM_LF_SN-MFG 53.9,61.8 r0 top (schematic designator J)
J_STP5 "B4B-XH-AM (LF)(SN)" FP-B4B-XH-AM_LF_SN-MFG 15.2,47.1 r0 top (schematic designator J)
J_STP6 "B4B-XH-AM (LF)(SN)" FP-B4B-XH-AM_LF_SN-MFG 28.1,47.1 r0 top (schematic designator J)
J_STP7 "B4B-XH-AM (LF)(SN)" FP-B4B-XH-AM_LF_SN-MFG 41,47.1 r0 top (schematic designator J)
J_STP8 "B4B-XH-AM (LF)(SN)" FP-B4B-XH-AM_LF_SN-MFG 53.9,47.1 r0 top (schematic designator J)
L1_PWR "DFE322520FD-4R7M=P2" FP-DFE322520F_D-IPC_A 27.4,18.7 r180 top value=4.7µH
Q1_IP "STL220N6F7" STL220N6F7 18.4,18.4 r90 top
Q2_IP "STL220N6F7" STL220N6F7 18.4,18.4 r270 bottom
Q_COIL1 "SSM3K376R,LF" SSM3K376R,LF 63.2,61 r90 bottom (schematic designator Q)
Q_COIL2 "SSM3K376R,LF" SSM3K376R,LF 69.3,61 r90 bottom (schematic designator Q)
Q_COIL3 "SSM3K376R,LF" SSM3K376R,LF 75.4,61 r90 bottom (schematic designator Q)
Q_COIL4 "SSM3K376R,LF" SSM3K376R,LF 81.5,61 r90 bottom (schematic designator Q)
Q_COIL5 "SSM3K376R,LF" SSM3K376R,LF 63.2,55.3 r90 bottom (schematic designator Q)
Q_COIL6 "SSM3K376R,LF" SSM3K376R,LF 69.3,55.3 r90 bottom (schematic designator Q)
Q_COIL7 "SSM3K376R,LF" SSM3K376R,LF 75.4,55.3 r90 bottom (schematic designator Q)
Q_COIL8 "SSM3K376R,LF" SSM3K376R,LF 81.5,55.3 r90 bottom (schematic designator Q)
R1 "ERJ-2GEJ103X" "Generic 0402 Resistor" 44.7,9 r0 top value=10k
R1_BTN1 "ERJ-2GEJ103X" "Generic 0402 Resistor" 65.6,48.1 r0 bottom value=10k (schematic designator R1)
R1_BTN2 "ERJ-2GEJ103X" "Generic 0402 Resistor" 70.8,48.1 r0 bottom value=10k (schematic designator R1)
R1_BTN3 "ERJ-2GEJ103X" "Generic 0402 Resistor" 76,48.1 r0 bottom value=10k (schematic designator R1)
R1_BTN4 "ERJ-2GEJ103X" "Generic 0402 Resistor" 81.2,48.1 r0 bottom value=10k (schematic designator R1)
R1_BTN5 "ERJ-2GEJ103X" "Generic 0402 Resistor" 65.6,42.5 r0 bottom value=10k (schematic designator R1)
R1_BTN6 "ERJ-2GEJ103X" "Generic 0402 Resistor" 70.8,42.5 r0 bottom value=10k (schematic designator R1)
R1_BTN7 "ERJ-2GEJ103X" "Generic 0402 Resistor" 76,42.5 r0 bottom value=10k (schematic designator R1)
R1_BTN8 "ERJ-2GEJ103X" "Generic 0402 Resistor" 81.2,42.5 r0 bottom value=10k (schematic designator R1)
R1_CAN0 "TFA0805R60R4F-T5" "0805 Resistor" 87,51.3 r0 top value=60.4 (schematic designator R1)
R1_CAN1 "TFA0805R60R4F-T5" "0805 Resistor" 87,44.1 r0 top value=60.4 (schematic designator R1)
R1_ENET "WR04X1001FTL" "Generic 0402 Resistor" 73.7,29.25 r90 bottom value=1k
R1_IP "WSKW06122L000FEA" FP-WSKW0612-MFG 18.1,14 r270 bottom value=2m
R1_MCU "RC0402JR-07620RL" "Generic 0402 Resistor" 39.1,28.6 r180 bottom value=620
R1_PRES "ERJ-2GEJ103X" "Generic 0402 Resistor" 90.7,35.3 r90 bottom value=10k
R1_PWR "AC0402FR-0736KL" "Generic 0402 Resistor" 48.375,27.075 r90 bottom value=36k
R1_STP1 "PA1206FRM670R002L" "Generic 1206 resistor" 19.4,52 r90 bottom value=2m (schematic designator R1)
R1_STP2 "PA1206FRM670R002L" "Generic 1206 resistor" 32.3,52 r90 bottom value=2m (schematic designator R1)
R1_STP3 "PA1206FRM670R002L" "Generic 1206 resistor" 45.2,52 r90 bottom value=2m (schematic designator R1)
R1_STP4 "PA1206FRM670R002L" "Generic 1206 resistor" 58.1,52 r90 bottom value=2m (schematic designator R1)
R1_STP5 "PA1206FRM670R002L" "Generic 1206 resistor" 19.4,37.3 r90 bottom value=2m (schematic designator R1)
R1_STP6 "PA1206FRM670R002L" "Generic 1206 resistor" 32.3,37.3 r90 bottom value=2m (schematic designator R1)
R1_STP7 "PA1206FRM670R002L" "Generic 1206 resistor" 45.2,37.3 r90 bottom value=2m (schematic designator R1)
R1_STP8 "PA1206FRM670R002L" "Generic 1206 resistor" 58.1,37.3 r90 bottom value=2m (schematic designator R1)
R2_BTN1 "WR04X1001FTL" "Generic 0402 Resistor" 63.4,48.6 r270 bottom value=1k (schematic designator R2)
R2_BTN2 "WR04X1001FTL" "Generic 0402 Resistor" 68.6,48.6 r270 bottom value=1k (schematic designator R2)
R2_BTN3 "WR04X1001FTL" "Generic 0402 Resistor" 73.8,48.6 r270 bottom value=1k (schematic designator R2)
R2_BTN4 "WR04X1001FTL" "Generic 0402 Resistor" 79,48.6 r270 bottom value=1k (schematic designator R2)
R2_BTN5 "WR04X1001FTL" "Generic 0402 Resistor" 63.4,43 r270 bottom value=1k (schematic designator R2)
R2_BTN6 "WR04X1001FTL" "Generic 0402 Resistor" 68.6,43 r270 bottom value=1k (schematic designator R2)
R2_BTN7 "WR04X1001FTL" "Generic 0402 Resistor" 73.8,43 r270 bottom value=1k (schematic designator R2)
R2_BTN8 "WR04X1001FTL" "Generic 0402 Resistor" 79,43 r270 bottom value=1k (schematic designator R2)
R2_CAN0 "TFA0805R60R4F-T5" "0805 Resistor" 84.4,50.4 r90 top value=60.4 (schematic designator R2)
R2_CAN1 "TFA0805R60R4F-T5" "0805 Resistor" 84.4,43.2 r90 top value=60.4 (schematic designator R2)
R2_ENET "RMCA0402FT33R0-HP" "Generic 0402 Resistor" 71.9,23.05 r270 top value=33
R2_IP "AC0402JR-07680KL" "Generic 0402 Resistor" 21.4,12.2 r270 bottom value=680k
R2_MCU "WR04X472JTL" "Generic 0402 Resistor" 55.9,32.2 r270 bottom value=4.7k
R2_PRES "ERJ-2GEJ103X" "Generic 0402 Resistor" 90.7,26.5 r90 bottom value=10k
R2_PWR "AC0402FR-0736KL" "Generic 0402 Resistor" 50.375,27.075 r90 bottom value=36k
R2_STP1 "PA1206FRM670R002L" "Generic 1206 resistor" 19.4,56.5 r270 bottom value=2m (schematic designator R2)
R2_STP2 "PA1206FRM670R002L" "Generic 1206 resistor" 32.3,56.5 r270 bottom value=2m (schematic designator R2)
R2_STP3 "PA1206FRM670R002L" "Generic 1206 resistor" 45.2,56.5 r270 bottom value=2m (schematic designator R2)
R2_STP4 "PA1206FRM670R002L" "Generic 1206 resistor" 58.1,56.5 r270 bottom value=2m (schematic designator R2)
R2_STP5 "PA1206FRM670R002L" "Generic 1206 resistor" 19.4,41.8 r270 bottom value=2m (schematic designator R2)
R2_STP6 "PA1206FRM670R002L" "Generic 1206 resistor" 32.3,41.8 r270 bottom value=2m (schematic designator R2)
R2_STP7 "PA1206FRM670R002L" "Generic 1206 resistor" 45.2,41.8 r270 bottom value=2m (schematic designator R2)
R2_STP8 "PA1206FRM670R002L" "Generic 1206 resistor" 58.1,41.8 r270 bottom value=2m (schematic designator R2)
R3 "RMCF0402JT5K10" "Generic 0402 Resistor" 24.4,5.7 r0 bottom value=5.1k
R3_ENET "RMCA0402FT33R0-HP" "Generic 0402 Resistor" 72.9,23.05 r270 top value=33
R3_IP "AC0402JR-07680KL" "Generic 0402 Resistor" 21.8,13.6 r180 bottom value=680k
R3_MCU "WR04X472JTL" "Generic 0402 Resistor" 54.9,32.2 r270 bottom value=4.7k
R3_PWR "WR04X472JTL" "Generic 0402 Resistor" 49.375,27.075 r270 bottom value=4.7k
R4 "RMCF0402JT5K10" "Generic 0402 Resistor" 24.4,6.7 r180 bottom value=5.1k
R4_ENET "RMCA0402FT33R0-HP" "Generic 0402 Resistor" 73.9,23.05 r270 top value=33
R4_IP "RMCF0402FT11K0" "Generic 0402 Resistor" 22.5,10.8 r180 bottom value=11k
R4_MCU "WR04X472JTL" "Generic 0402 Resistor" 40.7,24.9 r90 top value=4.7k
R4_PWR "WR04X472JTL" "Generic 0402 Resistor" 51.375,27.075 r270 bottom value=4.7k
R5_IP "AC0402FR-7W22KL" "Generic 0402 Resistor" 22.4,15.1 r180 bottom value=22k
R5_MCU "WR04X472JTL" "Generic 0402 Resistor" 46.7,32.7 r180 bottom value=4.7k
R5_PWR "WR04X472JTL" "Generic 0402 Resistor" 52.375,27.075 r90 bottom value=4.7k
R6_ENET "RMCA0402FT33R0-HP" "Generic 0402 Resistor" 69.2,23.05 r270 top value=33
R6_IP "RMCF0402FT11K0" "Generic 0402 Resistor" 22.7,12.2 r270 bottom value=11k
R6_MCU "WR04X472JTL" "Generic 0402 Resistor" 46.7,31.7 r0 bottom value=4.7k
R6_PWR "WR04X472JTL" "Generic 0402 Resistor" 52.375,24.275 r90 bottom value=4.7k
R7_ENET "RMCA0402FT33R0-HP" "Generic 0402 Resistor" 70.2,23.05 r270 top value=33
R7_MCU "WR04X472JTL" "Generic 0402 Resistor" 43.7,20.6 r270 bottom value=4.7k
R7_PWR "WR04X472JTL" "Generic 0402 Resistor" 50.375,24.275 r90 bottom value=4.7k
R8_ENET "WR04X1001FTL" "Generic 0402 Resistor" 75.3,27.45 r90 top value=1k
R8_MCU "WR04X472JTL" "Generic 0402 Resistor" 44.7,20.6 r90 bottom value=4.7k
R8_PWR "WR04X472JTL" "Generic 0402 Resistor" 53.375,27.075 r270 bottom value=4.7k
R9_ENET "RMCA0402FT33R0-HP" "Generic 0402 Resistor" 66.3,25.25 r180 top value=33
R9_MCU "WR04X472JTL" "Generic 0402 Resistor" 79.6,11.6 r90 top value=4.7k
R9_PWR "WR04X472JTL" "Generic 0402 Resistor" 53.375,24.275 r270 bottom value=4.7k
R10_ENET "RMCA0402FT33R0-HP" "Generic 0402 Resistor" 66.3,26.25 r180 top value=33